# Altium PCB Arduino UNO R3-V2.PcbDoc
Units mm, origin at the board's own origin, x right, y up, seen from the top; angles counter-clockwise.
Board outline 68 x 58 mm, 4 copper layers (L1, L2, L3, L4), stack 0.603 mm thick; 49 components, 60 nets, 266 pads, 62 vias.
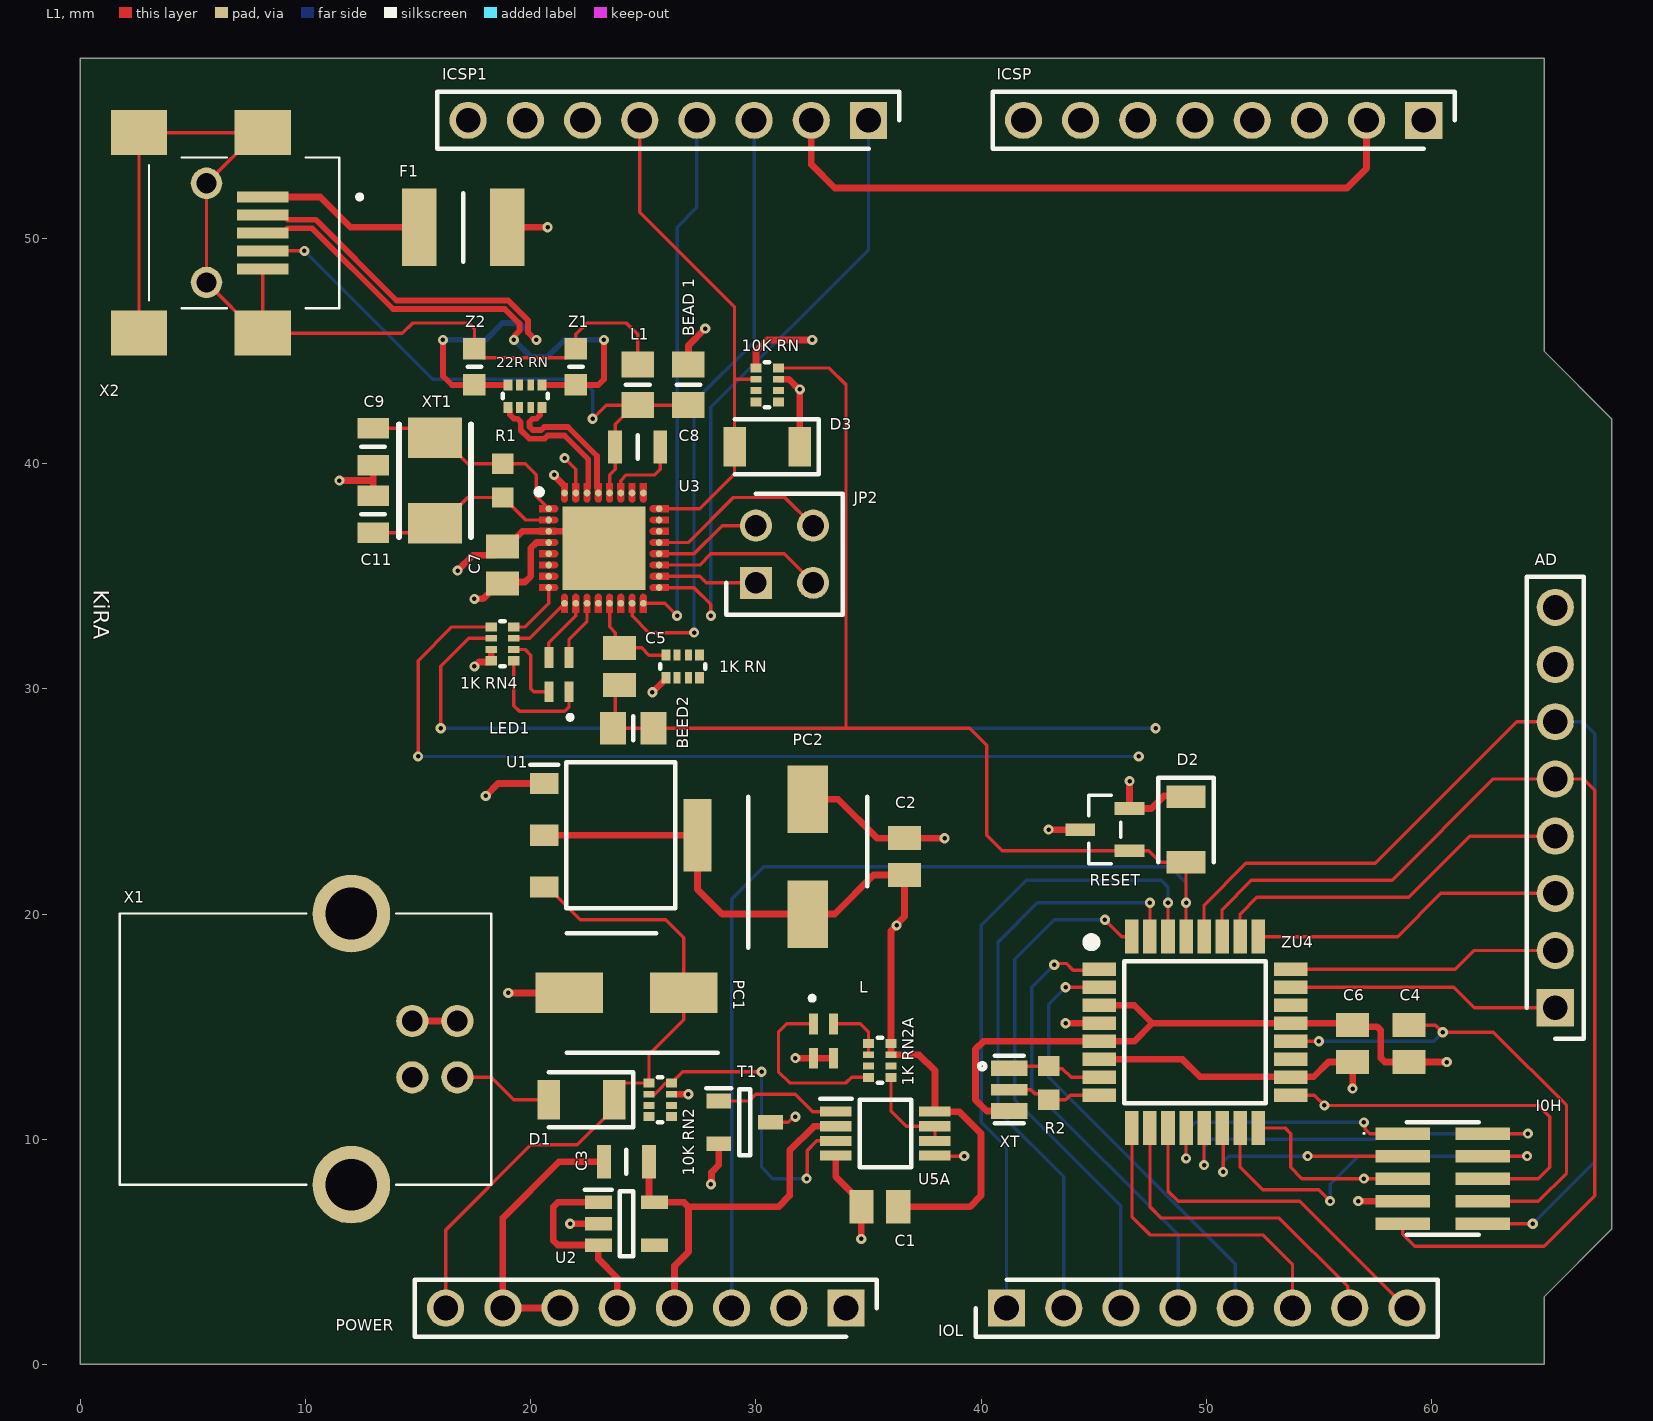
[diagram p0: L1 view]
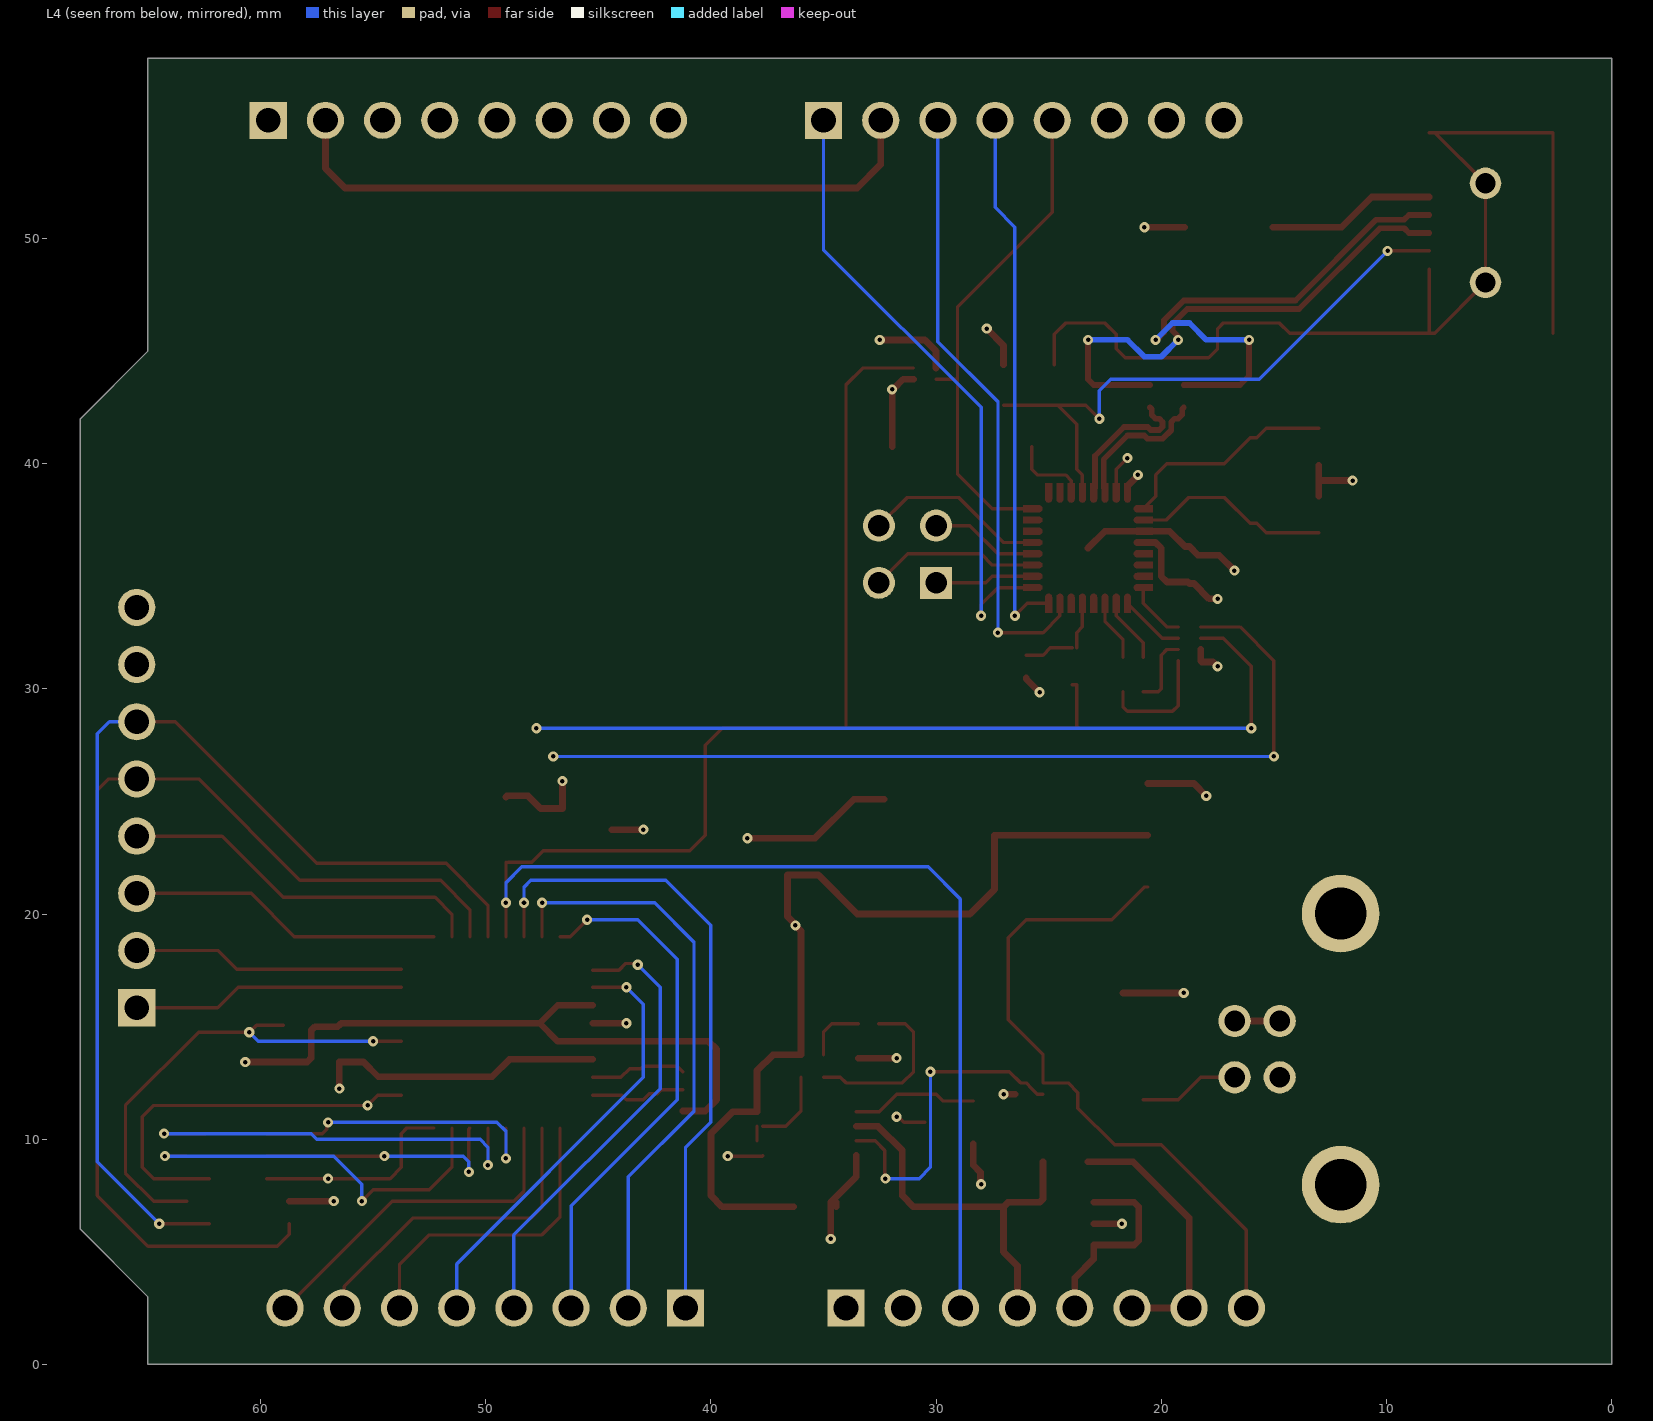
[diagram p1: L4 view, seen from below]
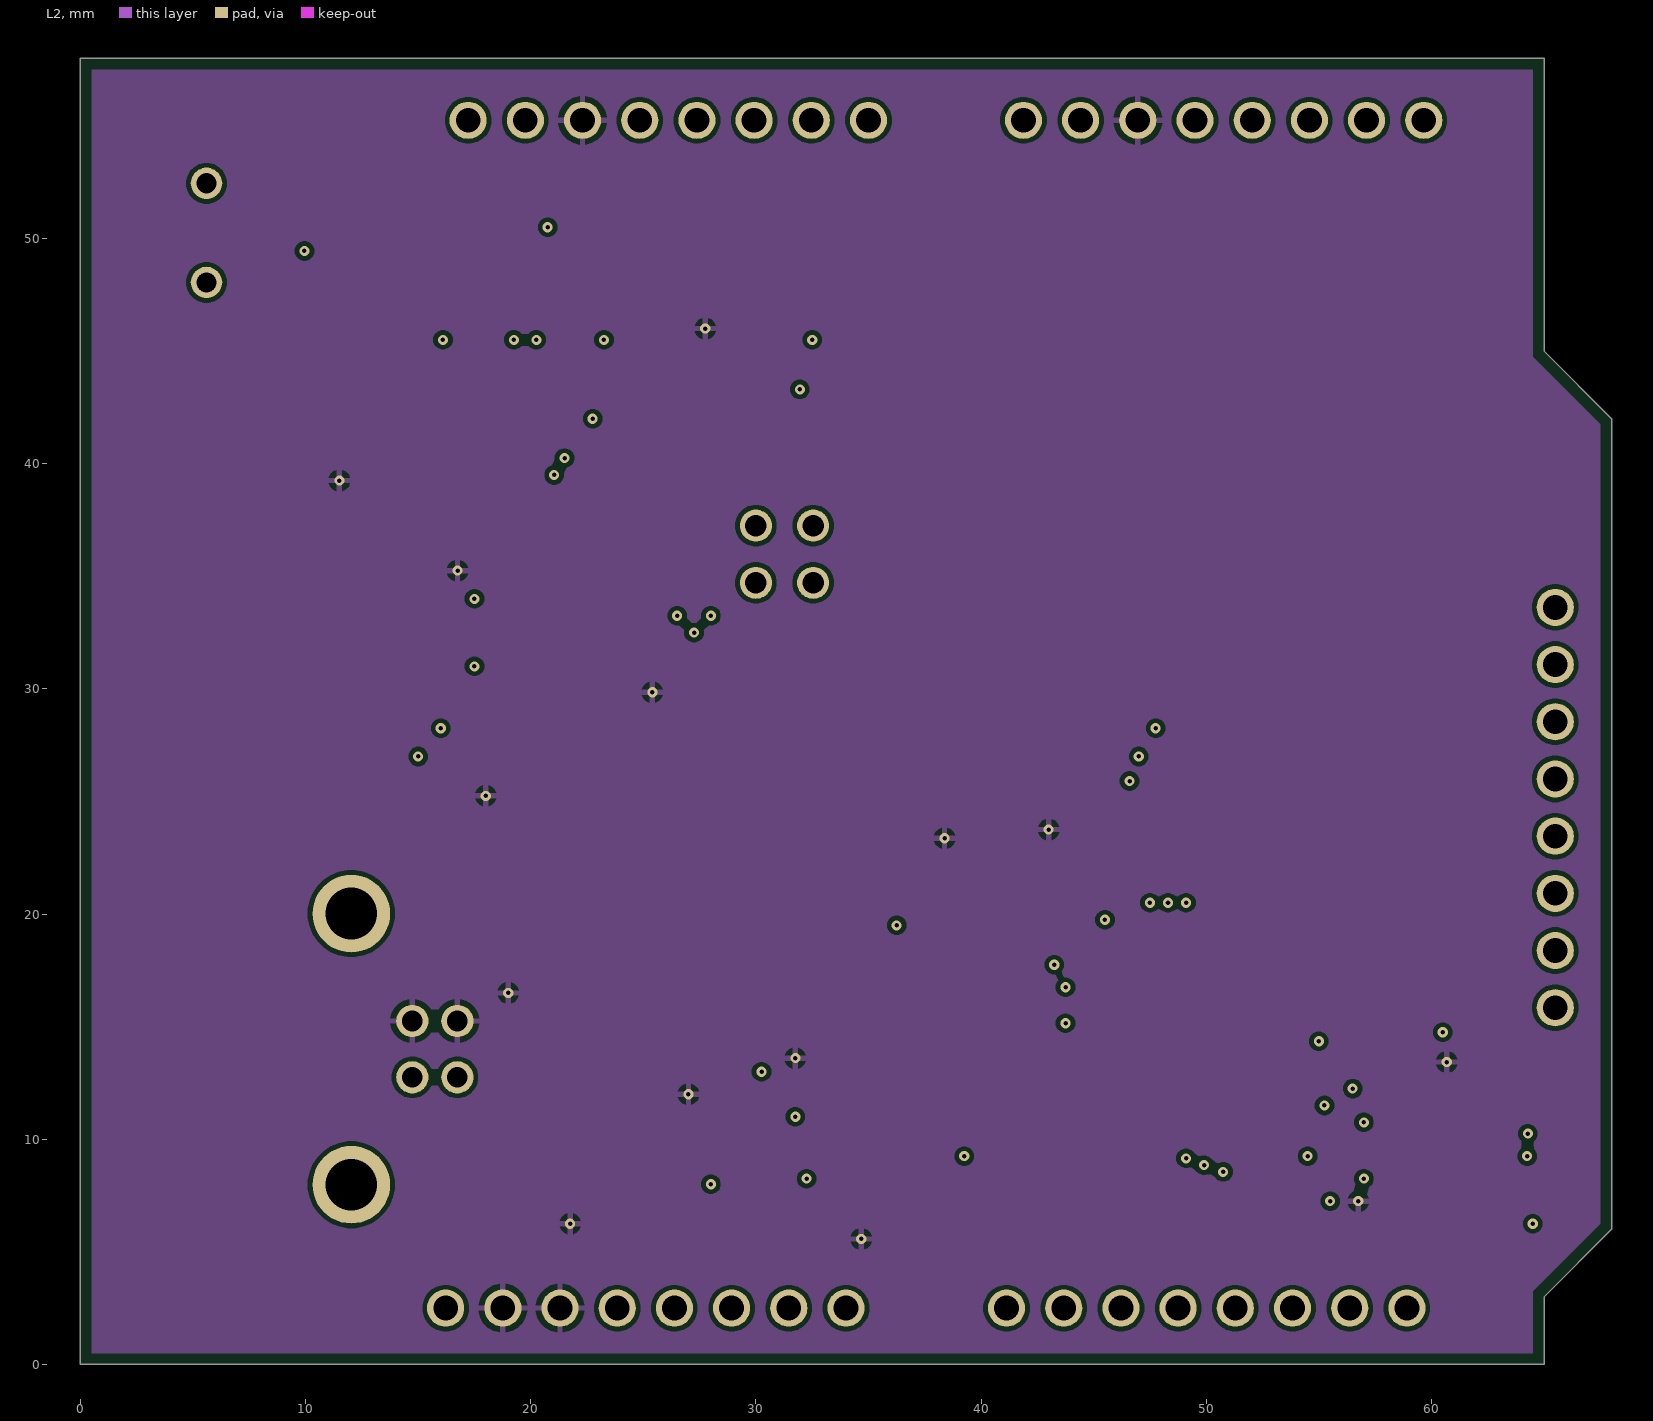
[diagram p2: L2]
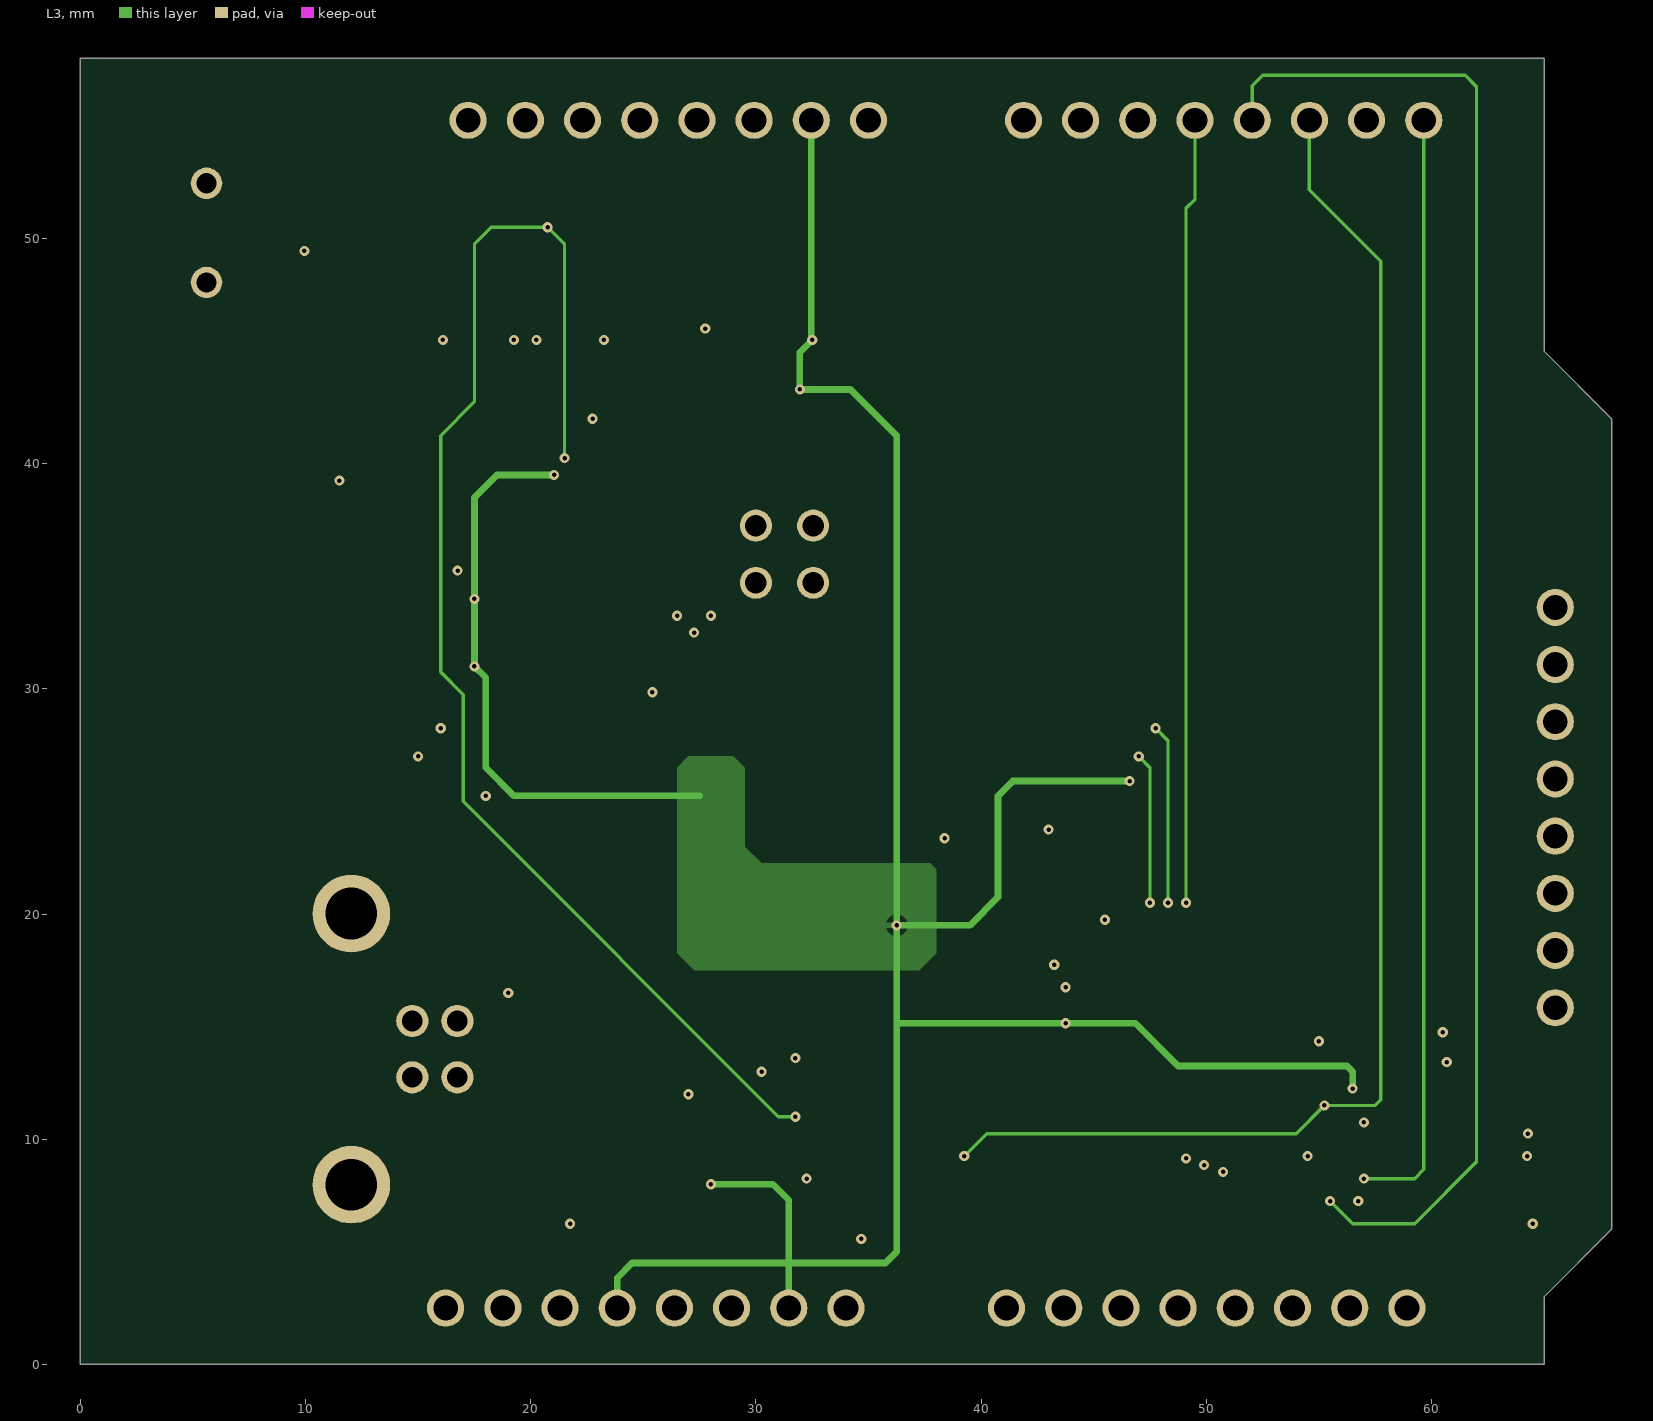
[diagram p3: L3]
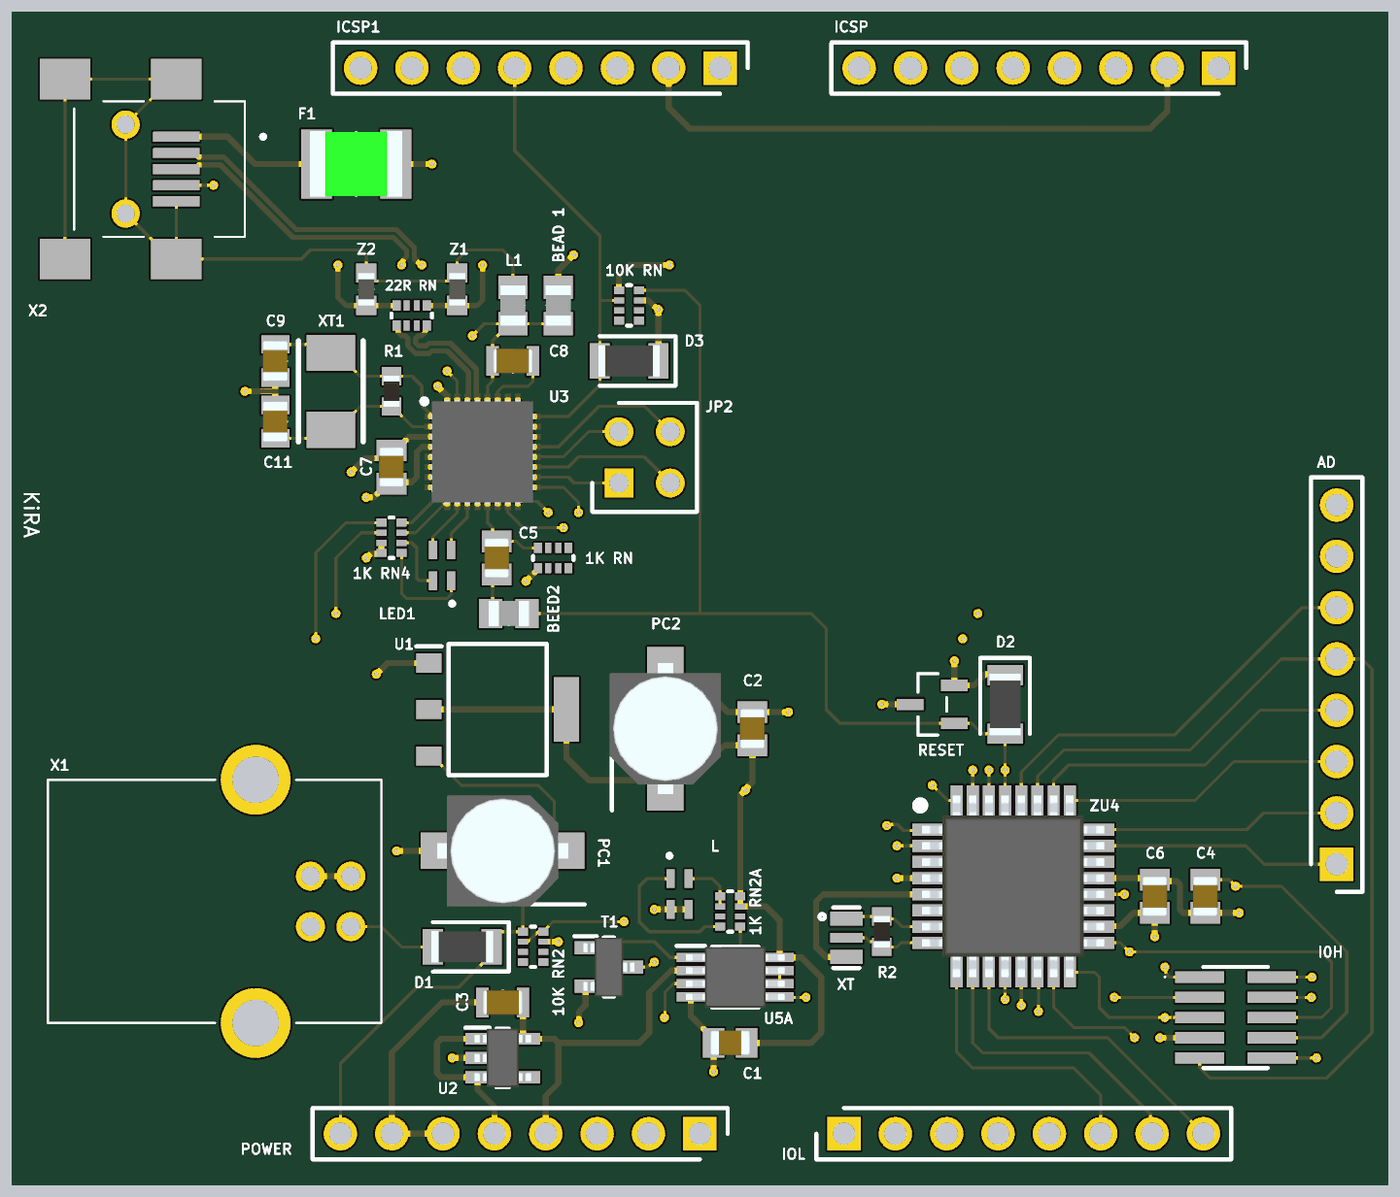
[diagram p4: 3D render of the assembled board from above, using the file's embedded part models]

## Layer stack, top to bottom
Top Solder: solder mask 0.0102, Solder Resist, Dk 3.5
L1: signal copper 0.0356
Dielectric 2: prepreg 0.0711, PP-006, Dk 4.1
L2: signal copper 0.035
Dielectric 1: dielectric 0.32, FR-4, Dk 4.8
L3: signal copper 0.035
Dielectric 3: prepreg 0.0711, PP-006, Dk 4.1
L4: signal copper 0.0356
Bottom Solder: solder mask 0.0102, Solder Resist, Dk 3.5

## Board outline
0,58 0,0 65,0 65,3 68,6 68,42 65,45 65,58

## Design rules (kind name [scope] priority, off if disabled: settings)
Clearance [All] p1: gap=0.1 ignorepadtopadclearanceinfootprint=FALSE except(0: Arc-Arc Arc-Track Arc-Hole Track-Track Track-Hole SMDPad-Hole THPad-Hole Via-Hole Fill-Text Fill-Hole Poly-Text Poly-Hole Region-Text Region-Hole Text-Text Text-Hole; 0.12: Arc-SMDPad Arc-Fill Arc-Poly Arc-Region Track-SMDPad Track-Fill Track-Poly Track-Region SMDPad-SMDPad SMDPad-Via THPad-Via; 0.14: Arc-THPad Track-THPad; 0.2: THPad-Fill THPad-Poly THPad-Region Via-Fill Via-Poly Via-Region)
DiffPairsRouting [All] p1: maxlimit=0.254 minlimit=0.127 mostfreqgap=0.127 toplayer_minwidth=0.254 toplayer_maxwidth=0.254 toplayer_prefwidth=0.254 midlayer1_minwidth=0.254 midlayer1_maxwidth=0.254 midlayer1_prefwidth=0.254 midlayer2_minwidth=0.254 midlayer2_maxwidth=0.254 midlayer2_prefwidth=0.254 bottomlayer_minwidth=0.254 bottomlayer_maxwidth=0.254 bottomlayer_prefwidth=0.254 maxuncoupledlength=12.7
MinimumSolderMaskSliver [All] p1: minsoldermaskwidth=0.05
PolygonConnect [All] p1: connectstyle=Relief reliefconductorwidth=0.254 reliefentries=4 polygonreliefangle="90 Angle" airgapwidth=0.254
RoutingVias [All] p1: holewidth=0.45 width=1.27 viastyle="Through Hole" minholewidth=0.2 minwidth=0.45 maxholewidth=0.45 maxwidth=1.27
SilkToSolderMaskClearance [IsPad] p1: minsilkscreentomaskgap=0.05 clearancetoexposedcopper=TRUE
SolderMaskExpansion [All] p1: expansion=0.102 istentingtop=FALSE
SupplyNets "Schematic Supply Nets_1" [InNet('GND')] p1: voltage=0.000
SupplyNets "Schematic Supply Nets" [InNet('+5')] p2: voltage=0.000
Width "Schematic Width Constraint_2" [InNet('+5')] p1: maxlimit=0.3 minlimit=0.3 preferedwidth=0.3
Width "Schematic Width Constraint_1" [InNet('+3V3')] p2: maxlimit=0.3 minlimit=0.3 preferedwidth=0.3
Width "Schematic Width Constraint" [InNet('GND')] p3: maxlimit=0.3 minlimit=0.3 preferedwidth=0.3
Width [All] p4: maxlimit=0.5 minlimit=0.15 preferedwidth=0.15
27 further rules are at their usual default settings.

## Classes and differential pairs
component class "Connectors & Regulators": "1K RN2A" "10K RN2" C1 C2 C3 D1 L PC1 PC2 POWER T1 U1 U2 U5A X1
component class ATMega328P-PU: "1K RN4" AD BEED2 C4 C5 C6 D2 I0H ICSP IOL LED1 R2 RESET XT ZU4
component class ATMEGA16U2-MU: "1K RN" "10K RN" "22R RN" "BEAD 1" C7 C8 C9 C11 D3 F1 ICSP1 JP2 L1 R1 U3 X2 XT1 Z1 Z2

## Components (designator, comment, footprint, x,y, rotation, side; value= is the part's Value field where it differs from the comment)
"1K RN" "1K" CAY10-XXXJ4 26.75,31 r180 top
"1K RN2A" "1K" CAY10-XXXJ4 35.5,13.5 r90 top
"1K RN4" "1K" CAY10-XXXJ4 18.75,32 r90 top
"10K RN" "10K" CAY10-XXXJ4 30.5,43.5 r90 top
"10K RN2" "10K" CAY10-XXXJ4 25.75,11.75 r270 top
"22R RN" "22R" CAY10-XXXJ4 19.75,43 r0 top
AD "6X1F-8.5" HDRV8W90P0X254_1X8_2032X249X560P 65.5,15.84 r90 top
"BEAD 1" "GROUND" BEADC2012X105N 27,43.5 r270 top
BEED2 "RESET_EN" BEADC2012X105N 24.55,28.25 r180 top
C1 "100nF" CAPC2012X130N 35.5,7 r180 top
C2 "100nF" CAPC2012X130N 36.6,22.55 r90 top
C3 "1uF" CAPC2012X145N 24.25,9 r180 top
C4 "100nF" CAPC2012X130N 59,14.25 r270 top
C5 "100nF" CAPC2012X130N 23.95,31 r270 top
C6 "100nF" CAPC2012X130N 56.5,14.25 r270 top
C7 "100nF" CAPC2012X130N 18.75,35.5 r270 top
C8 "1uF" CAPC2012X145N 24.75,40.75 r0 top
C9 "22pF" CAPC2012X70N 13,40.75 r90 top
C11 "22pF" CAPC2012X70N 13,37.75 r270 top
D1 "CD1206-S01575" DIOC3016X65N 22.25,11.75 r180 top
D2 "CD1206-S01575" DIOC3016X65N 49.1,23.75 r270 top
D3 "CD1206-S01575" DIOC3016X65N 30.5,40.75 r180 top
F1 "MF-MSMF050" FUSC4632X75N 17,50.5 r0 top
I0H "10X1F-H8.5" FTMH10503LDV 60.5,8.25 r270 top
ICSP "3X2 M" HDRV8W90P0X254_1X8_2032X249X560P 59.66,55.25 r180 top
ICSP1 "8X1 M" HDRV8W90P0X254_1X8_2032X249X560P 35,55.25 r180 top
IOL "8X1F-H8.5" HDRV8W90P0X254_1X8_2032X249X560P 41.13,2.5 r0 top
JP2 "2X2 M" HDRV4W77P254_2X2_467X488X821P 30,34.71 r0 top
L "Red" SML522MD8WT86 33,14.75 r90 top
L1 "BLM21BD601SH1D" BEADC2012X105N 24.75,43.5 r90 top
LED1 "RXTX LED" SML522MD8WT86 21.25,30.25 r270 top
PC1 "47uF" CAPAE530X610N 24.25,16.5 r180 top
PC2 "47uF" CAPAE530X610N 32.3,22.55 r90 top
POWER "8X1F-H8.5" HDRV8W90P0X254_1X8_2032X249X560P 34,2.5 r180 top
R1 "1M" RESC1608X55N 18.75,39.25 r90 top
R2 "1M" RESC1608X55N 43,12.5 r90 top
RESET "TS42031" SOT95P240X110-3N 45.5,23.75 r180 top
T1 "FDN340P" SOT95P251X112-3N 29.5,10.75 r0 top
U1 "NCP1117ST50T3G" SOT230P700X180-4N 24,23.5 r0 top
U2 "LP2985" SOT95P280X145-5N 24.25,6.25 r0 top
U3 "ATMEGA16U2-MU" QFN50P500X500X100-33N-D 23.25,36.25 r0 top
U5A "LMV358IDGKR" SOP65P490X110-8N 35.75,10.25 r0 top
X1 "DC21MMX" USBBSRA 10,14 r270 top
X2 "USB_B_TH" 17340351 7.55,50.25 r0 top
XT "CSTCE16M0V53-R0" CSTCE-V 41.25,12.2 r90 top
XT1 "16MHz" MODEL-445 15.75,39.25 r90 top
Z1 "CG0603MLC-05E" VARC1608X55N 22,44.3 r270 top
Z2 "CG0603MLC-05E" VARC1608X55N 17.5,44.3 r270 top
ZU4 "ATMEGA328P-AU" QFP80P900X900X120-32N 49.5,14.75 r0 top

## Footprints (in the part's own frame and the unit in brackets; to place one, negate y for a bottom-side part, rotate by r counter-clockwise, add the part's x,y. Pads: shape width x height; smd on the part's side, far side on the other; paste and mask are expansions set on the pad)
17340351 [mm]
  rect 2.3x0.5 smd: 1(0.55,1.6) 2(0.55,0.8) 3(0.55,0) 4(0.55,-0.8) 5(0.55,-1.6)
  rect 2.5x2 smd: 6(0.55,4.45) 7(0.55,-4.45) 8(-4.95,4.45) 9(-4.95,-4.45)
  round 1.4 hole 0.9: 10(-1.95,2.2) 11(-1.95,-2.2)
  silkscreen extent -4.5,-3.35 4.95,3.35
BEADC2012X105N [mm]
  rect 1.15x1.45 smd: 1(-0.9,0) 2(0.9,0)
  silkscreen extent 0,-0.53 0,0.53, body extent -1,-0.63 1,0.63, height 1.05
CAPAE530X610N [mm]
  rect 3x1.8 smd: 1(-2.55,0) 2(2.55,0)
  silkscreen extent -4.05,-2.65 2.65,2.65, body extent -3.25,-2.75 3.25,2.75, height 6.1
CAPC2012X70N [mm]
  rect 0.91x1.39 smd: 1(-0.82,0) 2(0.82,0)
  silkscreen extent 0,-0.53 0,0.53, body extent -1,-0.63 1,0.63, height 0.7
CAPC2012X130N [mm]
  rect 1.07x1.47 smd: 1(-0.82,0) 2(0.82,0)
  body extent -1,-0.63 1,0.63, height 1.3
CAPC2012X145N [mm]
  rect 0.62x1.47 smd: 1(-1,0) 2(1,0)
  silkscreen extent 0,-0.53 0,0.53, body extent -1,-0.63 1,0.63, height 1.45
CAY10-XXXJ4 [mm]
  rect 0.4x0.5 smd: 1(-0.75,-0.5) 4(0.75,-0.5) 5(0.75,0.5) 8(-0.75,0.5)
  rect 0.3x0.5 smd: 2(-0.25,-0.5) 3(0.25,-0.5) 6(0.25,0.5) 7(-0.25,0.5)
  silkscreen extent -1,-0.1 1,0.1
CSTCE-V [mm]
  rect 0.7x1.6 smd: 1(0.95,0) 3(-0.95,0)
  rect 0.5x1.6 smd: 2(0,0)
  silkscreen extent -1.5,-0.65 1.5,1.34
DIOC3016X65N [mm]
  rect 1x1.75 smd: 1(-1.45,0) 2(1.45,0)
  silkscreen extent -2.3,-1.22 1.45,1.22, body extent -1.53,-0.77 1.53,0.77, height 0.65
FTMH10503LDV [mm]
  rect 0.56x2.41 smd: 1(-2,-1.78) 2(-2,1.78) 3(-1,-1.78) 4(-1,1.78) 5(0,-1.78) 6(0,1.78) 7(1,-1.78) 8(1,1.78) 9(2,-1.78) 10(2,1.78)
  silkscreen extent -2.5,-3.53 2.5,1.59
FUSC4632X75N [mm]
  rect 1.53x3.43 smd: 1(-1.96,0) 2(1.96,0)
  silkscreen extent 0,-1.52 0,1.52, body extent -2.27,-1.62 2.27,1.62, height 0.75
HDRV4W77P254_2X2_467X488X821P [mm]
  rect 1.425x1.425 / inner round 1.425 / far side rect 1.425x1.425 hole 0.95: 1(0,0)
  round 1.425 hole 0.95: 2(0,2.54) 3(2.54,0) 4(2.54,2.54)
  silkscreen extent -1.32,-1.43 3.86,3.97
HDRV8W90P0X254_1X8_2032X249X560P [mm]
  rect 1.65x1.65 / inner round 1.65 / far side rect 1.65x1.65 hole 1.1: 1(0,0)
  round 1.65 hole 1.1: 2(2.54,0) 3(5.08,0) 4(7.62,0) 5(10.16,0) 6(12.7,0) 7(15.24,0) 8(17.78,0)
  silkscreen extent -1.37,-1.27 19.15,1.27
MODEL-445 [mm]
  rect 1.8x2.4 smd: 1(-1.9,0) 2(1.9,0)
  silkscreen extent -2.5,-1.6 2.5,1.6
QFN50P500X500X100-33N-D [mm]
  round 0.3 smd: 1(-2.45,1.75) 2(-2.45,1.25) 3(-2.45,0.75) 4(-2.45,0.25) 5(-2.45,-0.25) 6(-2.45,-0.75) 7(-2.45,-1.25) 8(-2.45,-1.75) 9(-1.75,-2.45) 10(-1.25,-2.45) 11(-0.75,-2.45) 12(-0.25,-2.45) 13(0.25,-2.45) 14(0.75,-2.45) 15(1.25,-2.45) 16(1.75,-2.45) 17(2.45,-1.75) 18(2.45,-1.25) 19(2.45,-0.75) 20(2.45,-0.25) 21(2.45,0.25) 22(2.45,0.75) 23(2.45,1.25) 24(2.45,1.75) 25(1.75,2.45) 26(1.25,2.45) 27(0.75,2.45) 28(0.25,2.45) 29(-0.25,2.45) 30(-0.75,2.45) 31(-1.25,2.45) 32(-1.75,2.45)
  rrect0% 3.7x3.7 smd: 33(0,0)
  L1 region: -2.875,-0.1 -2.175,-0.099 -2.136,-0.104 -2.099,-0.119 -2.068,-0.143 -2.044,-0.174 -2.029,-0.211 -2.024,-0.25 -2.029,-0.289 -2.044,-0.326 -2.068,-0.357 -2.099,-0.381 -2.136,-0.396 -2.175,-0.401 -2.175,-0.4 -2.875,-0.4
  L1 region: -2.875,-0.6 -2.175,-0.599 -2.136,-0.604 -2.099,-0.619 -2.068,-0.643 -2.044,-0.674 -2.029,-0.711 -2.024,-0.75 -2.029,-0.789 -2.044,-0.826 -2.068,-0.857 -2.099,-0.881 -2.136,-0.896 -2.175,-0.901 -2.175,-0.9 -2.875,-0.9
  L1 region: -2.875,-1.1 -2.175,-1.099 -2.136,-1.104 -2.099,-1.119 -2.068,-1.143 -2.044,-1.174 -2.029,-1.211 -2.024,-1.25 -2.029,-1.289 -2.044,-1.326 -2.068,-1.357 -2.099,-1.381 -2.136,-1.396 -2.175,-1.401 -2.175,-1.4 -2.875,-1.4
  L1 region: -0.4,-2.875 -0.401,-2.175 -0.396,-2.136 -0.381,-2.099 -0.357,-2.068 -0.326,-2.044 -0.289,-2.029 -0.25,-2.024 -0.211,-2.029 -0.174,-2.044 -0.143,-2.068 -0.119,-2.099 -0.104,-2.136 -0.099,-2.175 -0.1,-2.175 -0.1,-2.875
  L1 region: 0.6,-2.875 0.599,-2.175 0.604,-2.136 0.619,-2.099 0.643,-2.068 0.674,-2.044 0.711,-2.029 0.75,-2.024 0.789,-2.029 0.826,-2.044 0.857,-2.068 0.881,-2.099 0.896,-2.136 0.901,-2.175 0.9,-2.175 0.9,-2.875
  L1 region: 2.875,0.6 2.175,0.599 2.136,0.604 2.099,0.619 2.068,0.643 2.044,0.674 2.029,0.711 2.024,0.75 2.029,0.789 2.044,0.826 2.068,0.857 2.099,0.881 2.136,0.896 2.175,0.901 2.175,0.9 2.875,0.9
  L1 region: 2.875,1.1 2.175,1.099 2.136,1.104 2.099,1.119 2.068,1.143 2.044,1.174 2.029,1.211 2.024,1.25 2.029,1.289 2.044,1.326 2.068,1.357 2.099,1.381 2.136,1.396 2.175,1.401 2.175,1.4 2.875,1.4
  L1 region: 1.9,2.875 1.901,2.175 1.896,2.136 1.881,2.099 1.857,2.068 1.826,2.044 1.789,2.029 1.75,2.024 1.711,2.029 1.674,2.044 1.643,2.068 1.619,2.099 1.604,2.136 1.599,2.175 1.6,2.175 1.6,2.875
  L1 region: 1.4,2.875 1.401,2.175 1.396,2.136 1.381,2.099 1.357,2.068 1.326,2.044 1.289,2.029 1.25,2.024 1.211,2.029 1.174,2.044 1.143,2.068 1.119,2.099 1.104,2.136 1.099,2.175 1.1,2.175 1.1,2.875
  L1 region: -1.6,2.875 -1.599,2.175 -1.604,2.136 -1.619,2.099 -1.643,2.068 -1.674,2.044 -1.711,2.029 -1.75,2.024 -1.789,2.029 -1.826,2.044 -1.857,2.068 -1.881,2.099 -1.896,2.136 -1.901,2.175 -1.9,2.175 -1.9,2.875
  L1 region: -2.875,0.4 -2.175,0.401 -2.136,0.396 -2.099,0.381 -2.068,0.357 -2.044,0.326 -2.029,0.289 -2.024,0.25 -2.029,0.211 -2.044,0.174 -2.068,0.143 -2.099,0.119 -2.136,0.104 -2.175,0.099 -2.175,0.1 -2.875,0.1
  L1 region: 0.1,-2.875 0.099,-2.175 0.104,-2.136 0.119,-2.099 0.143,-2.068 0.174,-2.044 0.211,-2.029 0.25,-2.024 0.289,-2.029 0.326,-2.044 0.357,-2.068 0.381,-2.099 0.396,-2.136 0.401,-2.175 0.4,-2.175 0.4,-2.875
  L1 region: -2.875,0.9 -2.175,0.901 -2.136,0.896 -2.099,0.881 -2.068,0.857 -2.044,0.826 -2.029,0.789 -2.024,0.75 -2.029,0.711 -2.044,0.674 -2.068,0.643 -2.099,0.619 -2.136,0.604 -2.175,0.599 -2.175,0.6 -2.875,0.6
  L1 region: -1.9,-2.875 -1.901,-2.175 -1.896,-2.136 -1.881,-2.099 -1.857,-2.068 -1.826,-2.044 -1.789,-2.029 -1.75,-2.024 -1.711,-2.029 -1.674,-2.044 -1.643,-2.068 -1.619,-2.099 -1.604,-2.136 -1.599,-2.175 -1.6,-2.175 -1.6,-2.875
  L1 region: -2.875,-1.6 -2.175,-1.599 -2.136,-1.604 -2.099,-1.619 -2.068,-1.643 -2.044,-1.674 -2.029,-1.711 -2.024,-1.75 -2.029,-1.789 -2.044,-1.826 -2.068,-1.857 -2.099,-1.881 -2.136,-1.896 -2.175,-1.901 -2.175,-1.9 -2.875,-1.9
  L1 region: 2.875,-1.9 2.175,-1.901 2.136,-1.896 2.099,-1.881 2.068,-1.857 2.044,-1.826 2.029,-1.789 2.024,-1.75 2.029,-1.711 2.044,-1.674 2.068,-1.643 2.099,-1.619 2.136,-1.604 2.175,-1.599 2.175,-1.6 2.875,-1.6
  L1 region: 1.6,-2.875 1.599,-2.175 1.604,-2.136 1.619,-2.099 1.643,-2.068 1.674,-2.044 1.711,-2.029 1.75,-2.024 1.789,-2.029 1.826,-2.044 1.857,-2.068 1.881,-2.099 1.896,-2.136 1.901,-2.175 1.9,-2.175 1.9,-2.875
  L1 region: -2.875,1.9 -2.175,1.901 -2.136,1.896 -2.099,1.881 -2.068,1.857 -2.044,1.826 -2.029,1.789 -2.024,1.75 -2.029,1.711 -2.044,1.674 -2.068,1.643 -2.099,1.619 -2.136,1.604 -2.175,1.599 -2.175,1.6 -2.875,1.6
  L1 region: -2.875,1.4 -2.175,1.401 -2.136,1.396 -2.099,1.381 -2.068,1.357 -2.044,1.326 -2.029,1.289 -2.024,1.25 -2.029,1.211 -2.044,1.174 -2.068,1.143 -2.099,1.119 -2.136,1.104 -2.175,1.099 -2.175,1.1 -2.875,1.1
  L1 region: 2.875,-1.4 2.175,-1.401 2.136,-1.396 2.099,-1.381 2.068,-1.357 2.044,-1.326 2.029,-1.289 2.024,-1.25 2.029,-1.211 2.044,-1.174 2.068,-1.143 2.099,-1.119 2.136,-1.104 2.175,-1.099 2.175,-1.1 2.875,-1.1
  L1 region: 2.875,-0.9 2.175,-0.901 2.136,-0.896 2.099,-0.881 2.068,-0.857 2.044,-0.826 2.029,-0.789 2.024,-0.75 2.029,-0.711 2.044,-0.674 2.068,-0.643 2.099,-0.619 2.136,-0.604 2.175,-0.599 2.175,-0.6 2.875,-0.6
  L1 region: 2.875,-0.4 2.175,-0.401 2.136,-0.396 2.099,-0.381 2.068,-0.357 2.044,-0.326 2.029,-0.289 2.024,-0.25 2.029,-0.211 2.044,-0.174 2.068,-0.143 2.099,-0.119 2.136,-0.104 2.175,-0.099 2.175,-0.1 2.875,-0.1
  L1 region: 2.875,0.1 2.175,0.099 2.136,0.104 2.099,0.119 2.068,0.143 2.044,0.174 2.029,0.211 2.024,0.25 2.029,0.289 2.044,0.326 2.068,0.357 2.099,0.381 2.136,0.396 2.175,0.401 2.175,0.4 2.875,0.4
  L1 region: -0.1,2.875 -0.099,2.175 -0.104,2.136 -0.119,2.099 -0.143,2.068 -0.174,2.044 -0.211,2.029 -0.25,2.024 -0.289,2.029 -0.326,2.044 -0.357,2.068 -0.381,2.099 -0.396,2.136 -0.401,2.175 -0.4,2.175 -0.4,2.875
  L1 region: -0.6,2.875 -0.599,2.175 -0.604,2.136 -0.619,2.099 -0.643,2.068 -0.674,2.044 -0.711,2.029 -0.75,2.024 -0.789,2.029 -0.826,2.044 -0.857,2.068 -0.881,2.099 -0.896,2.136 -0.901,2.175 -0.9,2.175 -0.9,2.875
  L1 region: 2.875,1.6 2.175,1.599 2.136,1.604 2.099,1.619 2.068,1.643 2.044,1.674 2.029,1.711 2.024,1.75 2.029,1.789 2.044,1.826 2.068,1.857 2.099,1.881 2.136,1.896 2.175,1.901 2.175,1.9 2.875,1.9
  L1 region: -1.4,-2.875 -1.401,-2.175 -1.396,-2.136 -1.381,-2.099 -1.357,-2.068 -1.326,-2.044 -1.289,-2.029 -1.25,-2.024 -1.211,-2.029 -1.174,-2.044 -1.143,-2.068 -1.119,-2.099 -1.104,-2.136 -1.099,-2.175 -1.1,-2.175 -1.1,-2.875
  L1 region: 1.1,-2.875 1.099,-2.175 1.104,-2.136 1.119,-2.099 1.143,-2.068 1.174,-2.044 1.211,-2.029 1.25,-2.024 1.289,-2.029 1.326,-2.044 1.357,-2.068 1.381,-2.099 1.396,-2.136 1.401,-2.175 1.4,-2.175 1.4,-2.875
  L1 region: 0.9,2.875 0.901,2.175 0.896,2.136 0.881,2.099 0.857,2.068 0.826,2.044 0.789,2.029 0.75,2.024 0.711,2.029 0.674,2.044 0.643,2.068 0.619,2.099 0.604,2.136 0.599,2.175 0.6,2.175 0.6,2.875
  L1 region: -0.9,-2.875 -0.901,-2.175 -0.896,-2.136 -0.881,-2.099 -0.857,-2.068 -0.826,-2.044 -0.789,-2.029 -0.75,-2.024 -0.711,-2.029 -0.674,-2.044 -0.643,-2.068 -0.619,-2.099 -0.604,-2.136 -0.599,-2.175 -0.6,-2.175 -0.6,-2.875
  L1 region: 0.4,2.875 0.401,2.175 0.396,2.136 0.381,2.099 0.357,2.068 0.326,2.044 0.289,2.029 0.25,2.024 0.211,2.029 0.174,2.044 0.143,2.068 0.119,2.099 0.104,2.136 0.099,2.175 0.1,2.175 0.1,2.875
  L1 region: -1.1,2.875 -1.099,2.175 -1.104,2.136 -1.119,2.099 -1.143,2.068 -1.174,2.044 -1.211,2.029 -1.25,2.024 -1.289,2.029 -1.326,2.044 -1.357,2.068 -1.381,2.099 -1.396,2.136 -1.401,2.175 -1.4,2.175 -1.4,2.875
  silkscreen extent -3,2.38 -2.75,2.62, body extent -2.55,-2.55 2.55,2.55, height 1
QFP80P900X900X120-32N [mm]
  rect 1.5x0.6 smd: 1(-4.25,2.8) 2(-4.25,2) 3(-4.25,1.2) 4(-4.25,0.4) 5(-4.25,-0.4) 6(-4.25,-1.2) 7(-4.25,-2) 8(-4.25,-2.8) 17(4.25,-2.8) 18(4.25,-2) 19(4.25,-1.2) 20(4.25,-0.4) 21(4.25,0.4) 22(4.25,1.2) 23(4.25,2) 24(4.25,2.8)
  rect 0.6x1.5 smd: 9(-2.8,-4.25) 10(-2,-4.25) 11(-1.2,-4.25) 12(-0.4,-4.25) 13(0.4,-4.25) 14(1.2,-4.25) 15(2,-4.25) 16(2.8,-4.25) 25(2.8,4.25) 26(2,4.25) 27(1.2,4.25) 28(0.4,4.25) 29(-0.4,4.25) 30(-1.2,4.25) 31(-2,4.25) 32(-2.8,4.25)
  silkscreen extent -4.8,-3.15 3.15,4.2, body extent -4.5,-4.5 4.5,4.5, height 1.2
RESC1608X55N [mm]
  rect 0.9x0.95 smd: 1(-0.75,0) 2(0.75,0)
  body extent -0.77,-0.4 0.77,0.4, height 0.55
SML522MD8WT86 [mm]
  rect 0.925x0.4 smd: 1(0.375,0.45) 2(-1.15,0.45) 3(0.375,-0.45) 4(-1.15,-0.45)
  silkscreen extent 1.41,0.4 1.61,0.6
SOP65P490X110-8N [mm]
  rect 1.4x0.45 smd: 1(-2.2,0.975) 2(-2.2,0.325) 3(-2.2,-0.325) 4(-2.2,-0.975) 5(2.2,-0.975) 6(2.2,-0.325) 7(2.2,0.325) 8(2.2,0.975)
  silkscreen extent -2.9,-1.5 1.15,1.55, body extent -2.45,-1.5 2.45,1.5, height 1.1
SOT95P240X110-3N [mil]
  rect 52x22 smd: 1(-43,37) 2(-43,-37) 3(43,0)
  silkscreen extent -28,-60 28,60
SOT95P251X112-3N [mm]
  rect 1.1x0.65 smd: 1(-1.15,0.95) 2(-1.15,-0.95) 3(1.15,0)
  silkscreen extent -1.7,-1.46 0.25,1.53, body extent -1.25,-1.46 1.25,1.46, height 1.12
SOT95P280X145-5N [mm]
  rect 1.2x0.6 smd: 1(-1.25,0.95) 2(-1.25,0) 3(-1.25,-0.95) 4(1.25,-0.95) 5(1.25,0.95)
  silkscreen extent -1.85,-1.45 0.3,1.5, body extent -1.4,-1.45 1.4,1.45, height 1.45
SOT230P700X180-4N [mm]
  rect 1.25x0.95 smd: 1(-3.4,2.3) 2(-3.4,0) 3(-3.4,-2.3)
  rect 1.25x3.2 smd: 4(3.4,0)
  silkscreen extent -4.03,-3.25 2.42,3.25
USBBSRA [mm]
  round 1.431 hole 0.92: 1(-1.25,6.74) 2(1.25,6.74) 3(-1.25,4.74) 4(1.25,4.74)
  round 3.45 hole 2.3: 5(-6.02,2.03) 6(6.02,2.03)
  silkscreen extent -6.02,-8.25 6.02,8.25
VARC1608X55N [mm]
  rect 0.95x1 smd: 1(-0.8,0) 2(0.8,0)
  silkscreen extent 0,-0.3 0,0.3, body extent -0.8,-0.4 0.8,0.4, height 0.55

## Part data
"1K RN" "1K RN2A" "1K RN4" "10K RN" "10K RN2" "22R RN": library part CAY10-220J4LF, "CAY10 convex chip resistor array,22R Bourns CAY10 Series 22 5% Isolated SMT Resistor Array, 4 Resistors, 0.125W total 0804 package Convex", Manufacturer_Name=Bourns, Mouser Part Number=652-CAY10-220J4LF, RS Part Number=1674746, Allied Price/Stock=https://www.alliedelec.com/bourns-cay10-220j4lf/70276318/, Allied_Number=70276318, Datasheet Link=http://docs-emea.rs-online.com/webdocs/064e/0900766b8064e463.pdf, Manufacturer_Part_Number=CAY10-220J4LF, Mouser Price/Stock=https://www.mouser.com/Search/Refine.aspx?Keyword=652-CAY10-220J4LF, RS Price/Stock=http://uk.rs-online.com/web/p/products/1674746
AD ICSP ICSP1 IOL POWER: library part 90120-0768, "8 way single row straight header Molex C-GRID III Series, Series Number 90120, 2.54mm Pitch 8 Way 1 Row Straight Pin Header, Through Hole", Manufacturer_Name=Molex, Mouser Part Number=538-90120-0768, RS Part Number=1671900, Allied Price/Stock=https://www.alliedelec.com/molex-incorporated-90120-0768/70372836/, Allied_Number=70372836, Datasheet Link=http://www.molex.com/molex/products/datasheet.jsp?part=active/0901200768_PCB_HEADERS.xml, Geometry.Height=5.6mm, Manufacturer_Part_Number=90120-0768, Mouser Price/Stock=https://www.mouser.com/Search/Refine.aspx?Keyword=538-90120-0768, RS Price/Stock=http://uk.rs-online.com/web/p/products/1671900
"BEAD 1" BEED2: library part BLM21BD601SH1D, "Chip Ferrite Bead 600R 0805 300mA 1LN", Manufacturer_Name="Murata Electronics", Mouser Part Number=81-BLM21BD601SH1D, RS Part Number=1048541P, Datasheet Link=https://componentsearchengine.com/Datasheets/2/BLM21BD601SH1D.pdf, Geometry.Height=1.05mm, Manufacturer_Part_Number=BLM21BD601SH1D, Mouser Price/Stock=https://www.mouser.com/Search/Refine.aspx?Keyword=81-BLM21BD601SH1D, RS Price/Stock=http://uk.rs-online.com/web/p/products/1048541P
C1 C2 C4 C5 C6 C7: library part 0805Y0500104KXT, "Syfer Technology 0805 Flexicap 100nF Ceramic Multilayer Capacitor, 50 V, +125C, X7R Dielectric, 10% SMD", Manufacturer_Name=Syfer, Mouser Part Number=7738389P, Datasheet Link=http://docs-emea.rs-online.com/webdocs/119d/0900766b8119d7bc.pdf, Geometry.Height=1.3mm, Manufacturer_Part_Number=0805Y0500104KXT, Mouser Price/Stock=http://uk.rs-online.com/web/p/products/7738389P, RS Part Number=7738389P, RS Price/Stock=http://uk.rs-online.com/web/p/products/7738389P
C3 C8: library part C2012C0G2A103J125AA, "Multilayer Ceramic Capacitors MLCC - SMD/SMT 0805 C0G 100volts 0.01uF 5% 1.25mm", Manufacturer_Name=TDK, Mouser Part Number=810-C2012C0G2A103JAA, Datasheet Link=https://product.tdk.com/info/en/catalog/datasheets/mlcc_commercial_midvoltage_en.pdf, Geometry.Height=1.45mm, Manufacturer_Part_Number=C2012C0G2A103J125AA, Mouser Price/Stock=https://www.mouser.com/Search/Refine.aspx?Keyword=810-C2012C0G2A103JAA
C9 C11: library part GRM2165C1H220JZ01D, "MURATA - GRM2165C1H220JZ01D - CAP, MLCC, C0G/NP0, 22PF, 50V, 0805", Manufacturer_Name="Murata Electronics", Mouser Part Number=81-GRM2165C1H220JZ, RS Part Number=7236243, Datasheet Link=http://www.murata.com/~/media/webrenewal/support/library/catalog/products/capacitor/mlcc/c02e.pdf, Geometry.Height=0.7mm, Manufacturer_Part_Number=GRM2165C1H220JZ01D, Mouser Price/Stock=https://www.mouser.com/Search/Refine.aspx?Keyword=81-GRM2165C1H220JZ, RS Price/Stock=http://uk.rs-online.com/web/p/products/7236243
D1 D2 D3: "Diode Switching 100V 0.15A 4ns SMD1206 Bourns CD1206-S01575 Switching Diode, 150mA, 100V, 4ns, 2-Pin 1206", Manufacturer_Name=Bourns, Mouser Part Number=652-CD1206-S01575, RS Part Number=1775431, Allied Price/Stock=http://www.alliedelec.com/bourns-cd1206-s01575/70154675/, Allied_Number=70154675, Datasheet Link=http://docs-emea.rs-online.com/webdocs/1189/0900766b811897a9.pdf, Geometry.Height=0.65mm, Manufacturer_Part_Number=CD1206-S01575, Mouser Price/Stock=https://www.mouser.com/Search/Refine.aspx?Keyword=652-CD1206-S01575, RS Price/Stock=http://uk.rs-online.com/web/p/products/1775431
F1: library part 1812L050_30PR, "Littelfuse 0.5A Resettable Surface Mount Fuse, 30V dc", Manufacturer_Name=LITTELFUSE, Manufacturer_Part_Number=1812L050/30PR, Mouser Part Number=576-1812L050/30PR, RS Part Number=8951631P, Datasheet Link=https://www.arrow.com/en/products/1812l05030pr/littelfuse, Geometry.Height=0.75mm, Mouser Price/Stock=https://www.mouser.com/Search/Refine.aspx?Keyword=576-1812L050%2F30PR, RS Price/Stock=http://uk.rs-online.com/web/p/products/8951631P
I0H: library part FTMH-105-03-L-DV, "Header 1mm PCB SMT vertical 10way Samtec FTMH Series, 1mm Pitch 10 Way 2 Row Straight Pin Header, Surface Mount, Solder Termination", Manufacturer_Name=SAMTEC, Mouser Part Number=200-FTMH10503LDV, RS Part Number=7668984P, Datasheet Link=http://suddendocs.samtec.com/prints/ftmh-1xx-xx-xx-dv-xx-mkt.pdf, Manufacturer_Part_Number=FTMH-105-03-L-DV, Mouser Price/Stock=https://www.mouser.com/Search/Refine.aspx?Keyword=200-FTMH10503LDV, RS Price/Stock=http://uk.rs-online.com/web/p/products/7668984P
JP2: library part 5-146256-2, "AMP - TE CONNECTIVITY - 5-146256-2 - CONNECTOR, HEADER, 4 POSITION, 2ROWS, 2.54MM", Manufacturer_Name="TE Connectivity", Mouser Part Number=571-5-146256-2, RS Part Number=7972955, Allied Price/Stock=https://www.alliedelec.com/te-connectivity-5-146256-2/70085239/, Allied_Number=70085239, Datasheet Link=http://www.mouser.com/ds/2/418/NG_CD_146256_H-649289.pdf, Geometry.Height=8.21mm, Manufacturer_Part_Number=5-146256-2, Mouser Price/Stock=https://www.mouser.com/Search/Refine.aspx?Keyword=571-5-146256-2, RS Price/Stock=http://uk.rs-online.com/web/p/products/7972955
L LED1: library part SML-522MU8WT86, "Dual color mini-mold Chip LED: ROHM's chip LED lineup consists of standard type,top-view type, side-view type and reverse-mount type.", Manufacturer_Name="ROHM Semiconductor", Mouser Part Number=755-SML-522MU8WT86, RS Part Number=1682468, Datasheet Link=https://www.rohm.com/datasheet/SML-522MU8W/sml-52-e, Geometry.Height=0mm, Manufacturer_Part_Number=SML-522MU8WT86, Mouser Price/Stock=https://www.mouser.com/Search/Refine.aspx?Keyword=755-SML-522MU8WT86, RS Price/Stock=http://uk.rs-online.com/web/p/products/1682468
L1: "Chip Ferrite Bead 600R 0805 300mA 1LN", Manufacturer_Name="Murata Electronics", Mouser Part Number=81-BLM21BD601SH1D, RS Part Number=1048541P, Datasheet Link=https://componentsearchengine.com/Datasheets/2/BLM21BD601SH1D.pdf, Geometry.Height=1.05mm, Manufacturer_Part_Number=BLM21BD601SH1D, Mouser Price/Stock=https://www.mouser.com/Search/Refine.aspx?Keyword=81-BLM21BD601SH1D, RS Price/Stock=http://uk.rs-online.com/web/p/products/1048541P
PC1 PC2: library part EEE-FT1V470AR, "Aluminum Electrolytic Capacitors - SMD 47uF 35volts 5x5.8mm SMD", Manufacturer_Name=Panasonic, Mouser Part Number=667-EEE-FT1V470AR, Allied Price/Stock=https://www.alliedelec.com/panasonic-eee-ft1v470ar/70258388/, Allied_Number=70258388, Datasheet Link=https://industrial.panasonic.com/cdbs/www-data/pdf/RDE0000/ABA0000C1240.pdf, Geometry.Height=6.1mm, Manufacturer_Part_Number=EEE-FT1V470AR, Mouser Price/Stock=https://www.mouser.com/Search/Refine.aspx?Keyword=667-EEE-FT1V470AR
R1 R2: library part CPF0603B1M0E1, "TE CONNECTIVITY - CPF0603B1M0E1 - RES, THIN FILM, 1M, 0.1%, 0.063W, 0603", Manufacturer_Name="TE Connectivity", Mouser Part Number=279-CPF0603B1M0E1, Datasheet Link=http://www.farnell.com/datasheets/1786775.pdf, Geometry.Height=0.55mm, Manufacturer_Part_Number=CPF0603B1M0E1, Mouser Price/Stock=https://www.mouser.com/Search/Refine.aspx?Keyword=279-CPF0603B1M0E1
RESET: library part DS1818R-5+, "3.3V EconoReset with Pushbutton", Manufacturer_Name="Maxim Integrated", Manufacturer_Part_Number=DS1818R-5+
T1: "FDN340P, P-channel MOSFET Transistor 2 A 20 V, 3-Pin SuperSOT", Manufacturer_Name="Fairchild Semiconductor", Mouser Part Number=512-FDN340P, RS Part Number=6710435P, Datasheet Link=http://docs-emea.rs-online.com/webdocs/0d23/0900766b80d23111.pdf, Geometry.Height=1.12mm, Manufacturer_Part_Number=FDN340P, Mouser Price/Stock=https://www.mouser.com/Search/Refine.aspx?Keyword=512-FDN340P, RS Price/Stock=http://uk.rs-online.com/web/p/products/6710435P
U1: "ON SEMICONDUCTOR - NCP1117ST50T3G - LDO, REG, 20VIN, 1A, 5V, 1%, SOT223-3", Manufacturer_Name="ON Semiconductor", Mouser Part Number=863-NCP1117ST50T3G, RS Part Number=8022130P, Allied Price/Stock=http://www.alliedelec.com/on-semiconductor-ncp1117st50t3g/70466898/, Allied_Number=70466898, Datasheet Link=http://www.onsemi.com/pub/Collateral/NCP1117-D.PDF, Geometry.Height=1.8mm, Manufacturer_Part_Number=NCP1117ST50T3G, Mouser Price/Stock=https://www.mouser.com/Search/Refine.aspx?Keyword=863-NCP1117ST50T3G, RS Price/Stock=http://uk.rs-online.com/web/p/products/8022130P
U2: library part LP2985-33DBVR, "150-mA Low-noise Low-dropout Regulator With Shutdown", Manufacturer_Name="Texas Instruments", Mouser Part Number=595-LP2985-33DBVR, Datasheet Link=http://www.ti.com/lit/gpn/lp2985, Geometry.Height=1.45mm, Manufacturer_Part_Number=LP2985-33DBVR, Mouser Price/Stock=https://www.mouser.com/Search/Refine.aspx?Keyword=595-LP2985-33DBVR
U3: "8-bit Microcontrollers - MCU AVR USB 8K FLASH AVR USB 16K FLASH", Manufacturer_Name=Microchip, Mouser Part Number=556-ATMEGA16U2-MU, RS Part Number=1717746, Datasheet Link=http://ww1.microchip.com/downloads/en/DeviceDoc/doc7799.pdf, Geometry.Height=1mm, Manufacturer_Part_Number=ATMEGA16U2-MU, Mouser Price/Stock=https://www.mouser.com/Search/Refine.aspx?Keyword=556-ATMEGA16U2-MU, RS Price/Stock=http://uk.rs-online.com/web/p/products/1717746
U5A: "OP Amp Dual GP R-R O/P 5.5V 8-Pin MSOP Texas Instruments LMV358IDGKR, Dual Op Amp, 1MHz CMOS, Rail to Rail, 3 V, 5 V, 8-Pin MSOP", Manufacturer_Name="Texas Instruments", Mouser Part Number=595-LMV358IDGKR, RS Part Number=1625114, Datasheet Link=http://www.ti.com/lit/ds/symlink/lmv358.pdf, Geometry.Height=1.1mm, Manufacturer_Part_Number=LMV358IDGKR, Mouser Price/Stock=https://www.mouser.com/Search/Refine.aspx?Keyword=595-LMV358IDGKR, RS Price/Stock=http://uk.rs-online.com/web/p/products/1625114
X1: library part USB-B-S-RA, "MULTICOMP - USB-B-S-RA - USB, 2.0 TYPE B, RECEPTACLE, TH", Manufacturer_Name=MULTICOMP, Datasheet Link=http://www.farnell.com/datasheets/1788391.pdf, Geometry.Height=10mm, Manufacturer_Part_Number=USB-B-S-RA
X2: library part 1734035-1, "AMP - TE CONNECTIVITY - 1734035-1. - MINI USB, 2.0 TYPE B, RECEPTACLE, SMT", Manufacturer_Name="TE Connectivity", Mouser Part Number=571-1734035-1, Allied Price/Stock=https://www.alliedelec.com/te-connectivity-1734035-1/70086812/, Allied_Number=70086812, Datasheet Link=http://www.te.com/commerce/DocumentDelivery/DDEController?Action=srchrtrv&DocNm=1734035&DocType=Customer+Drawing&DocLang=English, Geometry.Height=4mm, Manufacturer_Part_Number=1734035-1, Mouser Price/Stock=https://www.mouser.com/Search/Refine.aspx?Keyword=571-1734035-1
XT: "Ceramic resonator SMT CSTCE 16.00MHz CSTCE16M0V53-R0, Ceramic Resonator, 16MHz Expander 15pF, 3-Pin Cap Chip, 3.2 x 1.3 x 0.9mm", Manufacturer_Name="Murata Electronics", Mouser Part Number=81-CSTCE16M0V53-R0, RS Part Number=7926524P, Datasheet Link=http://uk.rs-online.com/web/p/products/6241077, Manufacturer_Part_Number=CSTCE16M0V53-R0, Mouser Price/Stock=https://www.mouser.com/Search/Refine.aspx?Keyword=81-CSTCE16M0V53-R0, RS Price/Stock=http://uk.rs-online.com/web/p/products/7926524P
XT1: library part 445I35D16M00000, "Crystals 16MHz +/-30ppm 18pF -40C +85C", Manufacturer_Name=CTS, Mouser Part Number=774-445I35D16M00000, Datasheet Link=http://www.mouser.com/ds/2/96/008-0360-0-786290.pdf, Manufacturer_Part_Number=445I35D16M00000, Mouser Price/Stock=https://www.mouser.com/Search/Refine.aspx?Keyword=774-445I35D16M00000
Z1 Z2: "Varistor, ESD Protector, 5VDC,20V,0603 Bourns MLC Series Power Varistor 0.5pF 20V 0603 Case", Manufacturer_Name=Bourns, Mouser Part Number=652-CG0603MLC-05E, RS Part Number=8518256, Allied Price/Stock=https://www.alliedelec.com/bourns-cg0603mlc-05e/70153503/, Allied_Number=70153503, Datasheet Link=http://www.farnell.com/datasheets/1785244.pdf, Geometry.Height=0.55mm, Manufacturer_Part_Number=CG0603MLC-05E, Mouser Price/Stock=https://www.mouser.com/Search/Refine.aspx?Keyword=652-CG0603MLC-05E, RS Price/Stock=http://uk.rs-online.com/web/p/products/8518256
ZU4: "MICROCHIP - ATMEGA328P-AU. - MICROCONTROLLER MCU, 8 BIT, ATMEGA, 20MHZ, TQFP-32", Manufacturer_Name=Microchip, Mouser Part Number=556-ATMEGA328P-AU, RS Part Number=1310271, Datasheet Link=https://componentsearchengine.com/Datasheets/2/ATMEGA328P-AU.pdf, Geometry.Height=1.2mm, Manufacturer_Part_Number=ATMEGA328P-AU, Mouser Price/Stock=https://www.mouser.com/Search/Refine.aspx?Keyword=556-ATMEGA328P-AU, RS Price/Stock=http://uk.rs-online.com/web/p/products/1310271

## Via types
v1: diameter 0.45, hole 0.2, L1 to L4, 62 vias

## Nets (pads, with @x,y where several pads share a name; then routed paths per layer and width w, separated by ;. In a path a pad name is that pad's centre, name@x,y a point inside that pad or via, vN(x,y) a via of type N, cw(c..) or ccw(c..) an arc to the next point about the centre after c; other vN are vias at no path point)
+3V3: C3.1 POWER.4 U2.5 U5A.2 | length 17.5
  L1 w0.3: C3.1 25.25,7.35 25.4,7.2 U2.5 26.8,7.2 27,7 ; POWER.4 26.38,4.38 27,5 27,7 ; U5A.2 32.575,10.575 31.5,9.5 31.5,7.5 31,7 27,7
+5: "1K RN2A.3" "1K RN2A.4" "1K RN4.7" "1K RN4.8" "10K RN.3" "10K RN.5" C1.1 C2.1 C6.2 C7.2 D2.1 D3.1 ICSP1.2 ICSP.2 PC2.1 POWER.2 POWER.5 RESET.2 T1.2 U1.2 U1.4 U2.1 U2.3 U3.4 U3.32 U5A.8 ZU4.4 ZU4.6 ZU4.18 | length 254.4
  L1 w0.3: v1(17.5,31) 17.7,31.2 18.2,31.2 18.25,31.25 18.25,31.75 ; v1(17.5,34) 17.87,34 18.55,34.68 C7.2 18.82,34.75 19.75,34.75 20,35 20,36.25 20.25,36.5 U3.4 ; U1.2 U1.4 27.4,21.1 28.5,20 PC2.1 33.5,20 35.23,21.73 C2.1 36.6,19.891 36.25,19.541 v1(36.25,19.5) 36,19.25 36,14.25 36,13.75 37.25,13.75 37.95,13.05 U5A.8 39.025,11.225 40,10.25 40,7.5 39.5,7 C1.1 ; v1(21.037,39.5) 21.037,39.472 21.5,39.009 U3.32 ; U2.1 21.2,7.2 21,7 21,5.5 21.2,5.3 U2.3 23,4.68 23.84,3.84 POWER.5 ; v1(28,8) 28.029,8.029 28.029,8.529 28.35,8.851 T1.2 ; 30,44.25 30,45 30.5,45.5 v1(32.5,45.5) ; 31,43.75 31.459,43.75 31.909,43.3 v1(31.95,43.3) D3.1 ; ICSP1.2 32.46,53.29 33.5,52.25 56.25,52.25 57.12,53.12 ICSP.2 ; v1(43.75,15.15) ZU4.4 ; ZU4.6 48.95,13.55 49.726,12.774 54.774,12.774 55.43,13.43 C6.2 v1(56.5,12.25) ; v1(46.592,25.908) RESET.2 47.56,24.69 48.12,25.25 49.05,25.25 D2.1
  L3 w0.3: v1(21.037,39.5) 18.5,39.5 17.5,38.5 v1(17.5,34) v1(17.5,31) 18,30.5 18,26.5 19.25,25.25 27.5,25.25 ; POWER.5 23.84,3.84 24.5,4.5 31.46,4.5 ; v1(28,8) 30.75,8 31.46,7.29 31.46,4.5 ; POWER.2 31.46,4.5 ; ICSP1.2 32.46,45.46 31.95,44.95 v1(31.95,43.3) 34.2,43.3 36.25,41.25 v1(36.25,19.5) ; v1(46.592,25.908) 41.408,25.908 40.75,25.25 40.75,20.75 39.5,19.5 v1(36.25,19.5) ; v1(56.5,12.25) 56.5,13 56.25,13.25 48.75,13.25 46.85,15.15 v1(43.75,15.15) 36.35,15.15 36.25,15.25 ; 31.46,4.5 35.75,4.5 36.25,5 36.25,15.25 ; 36.25,15.25 v1(36.25,19.5)
AD0: AD.1 ZU4.23 | length 12.1
  L1 w0.15: ZU4.23 61,16.75 61.91,15.84 AD.1
AD1: AD.2 ZU4.24 | length 12.1
  L1 w0.15: ZU4.24 61.05,17.55 61.88,18.38 AD.2
AD2: AD.3 ZU4.25 | length 14
  L1 w0.15: ZU4.25 58.5,19 60.42,20.92 AD.3
AD3: AD.4 ZU4.26 | length 16.4
  L1 w0.15: ZU4.26 51.5,20 52.25,20.75 59,20.75 61.71,23.46 AD.4
AD4/SDA: AD.5 I0H.9 ZU4.27 | length 48.5
  L1 w0.15: ZU4.27 50.7,20.2 52,21.5 58.25,21.5 62.75,26 AD.5 66.75,26 67.25,25.5 67.25,7.5 65,5.25 59.25,5.25 58.72,5.78 I0H.9
AD5/SCL: AD.6 I0H.10 ZU4.28 | length 47.5
  L1 w0.15: ZU4.28 49.9,20.4 51.75,22.25 57.5,22.25 63.79,28.54 AD.6 ; I0H.10 v1(64.5,6.25)
  L4 w0.15: v1(64.5,6.25) 67.25,9 67.25,28 66.71,28.54 AD.6
AREF: C4.1 I0H.8 ZU4.20 | length 21.4
  L1 w0.15: ZU4.20 v1(55,14.35) ; C4.1 60.18,15.07 v1(60.5,14.75) ; 60.75,14.75 62.75,14.75 66,11.5 66,8.5 64.75,7.25 I0H.8@63.28,7.25
  L4 w0.15: v1(55,14.35) 60.1,14.35 v1(60.5,14.75)
CMP: "10K RN2.2" "10K RN2.8" U5A.3 | length 14.6
  L1 w0.15: 25.25,12 25.5,12 25.75,12.25 26,12.5 26.25,12.5 26.75,13 v1(30.25,13) ; v1(32.249,8.251) 32.28,8.282 32.28,9.5 32.705,9.925 U5A.3
  L4 w0.15: v1(30.25,13) 30.25,8.75 30.75,8.25 v1@32.248,8.25
D+: "22R RN.5" X2.3 Z1.2 | length 23.3
  L1 w0.254: X2.3 9,50.25 9.21,50.46 10.291,50.46 13.881,46.869 18.842,46.869 19.497,46.214 19.497,45.904 19.288,45.695 19.288,45.538 v1(19.25,45.5) ; 20.5,43.5 Z1.2 23,43.5 23.25,43.75 v1(23.25,45.5)
  L4 w0.254: v1(19.25,45.5) 20,44.75 20.75,44.75 21.5,45.5 v1(23.25,45.5)
D-: "22R RN.8" X2.2 Z2.2 | length 24.2
  L1 w0.254: X2.2 9,51.05 9.209,50.841 10.448,50.841 14.039,47.25 19,47.25 19.878,46.372 19.878,45.824 20.201,45.5 v1(20.25,45.5) ; v1(16.1,45.5) 16.1,43.9 16.5,43.5 Z2.2 19,43.5
  L4 w0.254: v1(16.1,45.5) 18,45.5 18.75,46.25 19.5,46.25 v1(20.25,45.5)
DTR: "1K RN.4" C5.1 U3.13 | length 4.3
  L1 w0.15: U3.13 23.5,32.75 23.75,32.5 C5.1@23.75,31.82 ; C5.1 24.93,31.82 25.25,31.5 26,31.5
GATECMD: T1.1 U5A.1 | length 5.6
  L1 w0.15: T1.1 29.7,11.7 30,12 31.75,12 32.525,11.225 U5A.1
GND: "1K RN.5" "10K RN2.7" "BEAD 1.1" C1.2 C2.2 C3.2 C4.2 C6.1 C7.1 C9.1 C11.1 I0H.7 ICSP1.6 ICSP.6 L.2 L.4 PC1.2 PC2.2 POWER.6 POWER.7 RESET.3 U1.1 U2.2 U3.3 U3.33 U5A.4 X1.1 X1.3 XT.3 ZU4.3 ZU4.5 ZU4.21 | length 80.3
  L1 w0.3: v1(11.5,39.25) 13,39.25 ; C11.1 13,39.25 ; C9.1 13,39.25 ; X1.3 X1.1 ; v1(16.75,35.25) 17.435,35.935 18.365,35.935 C7.1 18.95,36.32 19.63,37 U3.3 22.5,37 U3.33 ; v1(18,25.25) 18.55,25.8 U1.1 ; v1(19,16.5) PC1.2 ; POWER.6 POWER.7 18.76,6.51 21.25,9 C3.2 ; v1(21.75,6.25) U2.2 ; v1(25.4,29.85) 26,30.45 26,30.5 ; 26.5,12 v1(27,12) ; 27,44.4 27,45.25 v1(27.75,46) ; v1(31.75,13.6) L.2 L.4 ; PC2.2 33.65,25.1 35.38,23.37 C2.2 v1(38.38,23.37) ; U5A.4 33.55,8.33 34.68,7.2 C1.2 v1(34.68,5.57) ; C1.2@34.43,7 C1.2@34.43,7.2 ; XT.3 40.25,11.25 39.75,11.75 39.75,14 40.1,14.35 ZU4.5 46.8,14.35 47.6,15.15 ; v1(43,23.75) RESET.3 ; ZU4.3 46.8,15.95 47.6,15.15 ; v1(56.75,7.25) I0H.7 ; v1(60.68,13.43) C4.2 57.926,13.43 57.75,13.606 57.75,14.824 57.574,15 56.57,15 C6.1 56.42,15.15 ZU4.21 47.6,15.15
GREENLED: "1K RN2A.5" "1K RN2A.6" L.3 | length 2.7
  L1 w0.15: L.3 34.625,15.125 35,14.75 35,14.25 35,13.75
IO0: "1K RN4.6" IOL.1 ZU4.30 | length 74.2
  L1 w0.15: v1(16,28.25) 16,31.008 17.242,32.25 18.25,32.25 ; ZU4.30 v1(48.3,20.5)
  L3 w0.15: v1(47.75,28.25) 48.3,27.7 v1(48.3,20.5)
  L4 w0.15: v1(16,28.25) v1(47.75,28.25) ; IOL.1 41.13,9.62 40,10.75 40,19.5 42,21.5 48,21.5 48.3,21.2 v1(48.3,20.5)
IO1: "1K RN4.5" IOL.2 ZU4.31 | length 73.2
  L1 w0.15: v1(15,27) 15,31.25 16.5,32.75 18.25,32.75 ; ZU4.31 v1(47.5,20.5)
  L3 w0.15: v1@47.022,26.978 47.5,26.5 v1(47.5,20.5)
  L4 w0.15: v1(15,27) v1(47,27) ; IOL.2 43.67,8.33 40.75,11.25 40.75,18.75 42.5,20.5 v1(47.5,20.5)
IO2: IOL.3 ZU4.32 | length 23.7
  L1 w0.15: v1(45.5,19.75) 46.25,19 ZU4.32
  L4 w0.15: v1(45.5,19.75) 43.25,19.75 41.5,18 41.5,11.75 46.21,7.04 IOL.3
IO3: IOL.4 ZU4.1 | length 20.5
  L1 w0.15: v1(43.25,17.75) 43.306,17.806 43.775,17.806 44.081,17.5 ZU4.1@45.25,17.5
  L4 w0.15: v1(43.25,17.75) 42.25,16.75 42.25,12.25 48.75,5.75 IOL.4
IO4: IOL.5 ZU4.2 | length 19.5
  L1 w0.15: v1(43.75,16.75) ZU4.2
  L4 w0.15: v1(43.75,16.75) 43,16 43,12.75 51.29,4.46 IOL.5
IO5: IOL.6 ZU4.9 | length 13.9
  L1 w0.15: ZU4.9 46.7,6.55 47.5,5.75 52.5,5.75 53.83,4.42 IOL.6
IO6: IOL.7 ZU4.10 | length 14.7
  L1 w0.15: ZU4.10 47.5,7 48,6.5 53.25,6.5 56.288,3.462 56.288,2.582 IOL.7
IO7: IOL.8 ZU4.11 | length 15.6
  L1 w0.15: ZU4.11 48.3,7.7 48.75,7.25 54.16,7.25 IOL.8
IO8: I0H.1 ZU4.12 | length 13.8
  L1 w0.15: v1@49.1,9 v1(49.1,9.15) ZU4.12 ; v1(57,10.75) 57.057,10.693 57.057,10.443 57.25,10.25 I0H.1@59.72,10.25
  L4 w0.15: v1(49.1,9.15) 49.1,10.35 49.5,10.75 v1(57,10.75)
IO9: I0H.2 ZU4.13 | length 18.9
  L1 w0.15: v1(49.9,8.85) ZU4.13 ; I0H.2@62.455,10.25 v1(64.282,10.25)
  L4 w0.15: v1(49.9,8.85) 49.9,9.65 50.25,10 57.5,10 57.75,10.25 v1(64.282,10.25)
L13: "1K RN2A.1" U5A.6 U5A.7 | length 4.1
  L1 w0.15: 36,12.75 36,11.25 36.675,10.575 U5A.7@37.7,10.575 ; U5A.6 U5A.7
M8RXD: "1K RN4.3" U3.9 | length 2.9
  L1 w0.15: 19.25,32.25 19.95,32.25 U3.9
M8TXD: "1K RN4.4" U3.8 | length 2.7
  L1 w0.15: 19.25,32.75 19.75,32.75 20.8,33.8 U3.8
MISO: I0H.5 ICSP.1 ZU4.16 | length 58.7
  L1 w0.15: ZU4.16 53.5,10.5 53.75,10.25 53.75,8.75 54.25,8.25 I0H.5@59.72,8.25
  L3 w0.15: v1(57,8.25) 59.25,8.25 59.66,8.66 ICSP.1
MISO2: ICSP1.1 U3.17 | length 28
  L1 w0.15: U3.17 27.25,34.5 28,33.75 v1(28,33.25)
  L4 w0.15: v1(28,33.25) 28,42.5 35,49.5 ICSP1.1
MOSI: I0H.4 ICSP.4 ZU4.15 | length 85.1
  L1 w0.15: ZU4.15 51.5,8.75 52.5,7.75 55,7.75 v1(55.5,7.25) ; I0H.4@63.28,9.25 v1(64.25,9.25)
  L3 w0.15: ICSP.4 52.04,56.79 52.5,57.25 61.5,57.25 62,56.75 62,9 59.25,6.25 56.5,6.25 v1(55.5,7.25)
  L4 w0.15: v1(55.5,7.25) 55.5,8 56.75,9.25 v1(64.25,9.25)
MOSI2: ICSP1.4 U3.16 | length 24.1
  L1 w0.15: U3.16 25.95,33.8 v1(26.5,33.25)
  L4 w0.15: v1(26.5,33.25) 26.5,50.5 27.38,51.38 ICSP1.4
"Net1K RN2A_8": "1K RN2A.8" L.1 | length 7.8
  L1 w0.15: L.1 31.375,15.125 31,14.75 31,13 31.5,12.5 34,12.5 34.25,12.75 35,12.75
"Net1K RN4_1": "1K RN4.1" LED1.1 | length 5.3
  L1 w0.15: 19.25,31.25 19.25,29.25 19.5,29 21.5,29 21.7,29.2 LED1.1
"Net1K RN4_2": "1K RN4.2" LED1.3 | length 3.2
  L1 w0.15: 19.25,31.75 19.75,31.75 20,31.5 20,30 20.125,29.875 LED1.3
NetC9_2: C9.2 R1.2 U3.1 XT1.2 | length 9.8
  L1 w0.15: C9.2 15.33,41.57 XT1.2 16.05,41.15 17.2,40 R1.2 19.75,40 20.25,39.5 20.25,38.55 U3.1
NetC11_2: C11.2 R1.1 U3.2 XT1.1 | length 8.9
  L1 w0.15: C11.2 15.33,36.93 XT1.1 16.05,37.35 17.2,38.5 R1.1 18.775,38.5 19.775,37.5 U3.2
PB4: JP2.1 U3.18 | length 4.4
  L1 w0.15: U3.18 27.5,35 27.79,34.71 JP2.1
PB5: JP2.3 U3.19 | length 7.6
  L1 w0.15: U3.19 27.5,35.5 28,36 31.25,36 JP2.3
PB6: JP2.2 U3.20 | length 4.8
  L1 w0.15: U3.20 27.25,36 28.5,37.25 JP2.2
PB7: JP2.4 U3.21 | length 8.2
  L1 w0.15: U3.21 27,36.5 29,38.5 31.29,38.5 JP2.4
PWRIN: D1.2 X1.2 | length 4.5
  L1 w0.15: X1.2 18.25,12.75 19.25,11.75 D1.2
RD+: "22R RN.4" U3.29 | length 6.5
  L1 w0.254: 20.5,42.5 20.427,42.427 20.427,42.178 20.252,42.003 20.089,42.003 19.941,41.854 19.941,41.644 20.089,41.495 20.463,41.495 20.599,41.631 21.658,41.631 22.941,40.348 22.941,38.934 22.991,38.883 22.991,38.709 U3.29
RD-: "22R RN.1" U3.30 | length 6.5
  L1 w0.254: 19,42.5 19.073,42.427 19.073,42.178 19.248,42.003 19.411,42.003 19.56,41.854 19.56,41.486 19.931,41.114 20.621,41.114 20.757,41.25 21.5,41.25 22.56,40.191 22.56,38.934 22.509,38.883 22.509,38.709 U3.30
RESET: "10K RN.4" BEED2.1 BEED2.2 C5.2 D2.2 ICSP.5 POWER.3 RESET.1 ZU4.29 | length 129.2
  L1 w0.15: C5.2 23.75,30.18 23.75,28.35 BEED2.2 BEED2.1 34,28.25 ; 31,44.25 33.25,44.25 34,43.5 34,28.25 ; D2.2@49,22.3 47.95,22.3 47.44,22.81 RESET.1 40.94,22.81 40.25,23.5 40.25,27.5 39.5,28.25 34,28.25 ; ZU4.29 v1(49.1,20.5) D2.2
  L3 w0.15: v1(49.1,20.5) 49.1,51.35 49.5,51.75 ICSP.5
  L4 w0.15: POWER.3 28.92,20.67 30.35,22.1 48.4,22.1 49.1,21.4 v1(49.1,20.5)
RESET2: "10K RN.6" D3.2 ICSP1.5 U3.24 | length 22.4
  L1 w0.15: ICSP1.5 24.84,51.16 29.05,46.95 29.05,43.75 ; U3.24 27.5,38 29.05,39.55 D3.2 29.05,43.75 ; 30,43.75 29.05,43.75
RXLED: LED1.4 U3.10 | length 2.9
  L1 w0.15: LED1.4 20.8,32.05 22,33.25 U3.10
SCK: I0H.6 ICSP.3 U5A.5 ZU4.17 | length 83.2
  L1 w0.15: U5A.5@37.7,9.275 37.725,9.25 v1(39.25,9.25) ; ZU4.17 54.8,11.95 v1(55.25,11.5) 64.75,11.5 65.25,11 65.25,8.75 64.75,8.25 I0H.6
  L3 w0.15: v1(39.25,9.25) 40.25,10.25 54,10.25 v1(55.25,11.5) 57.5,11.5 57.75,11.75 57.75,49 54.58,52.17 ICSP.3
SCK2: ICSP1.3 U3.15 | length 27.5
  L1 w0.15: U3.15 24.5,33.25 25.25,32.5 v1(27.25,32.5)
  L4 w0.15: v1(27.25,32.5) 27.25,42.75 29.92,45.42 ICSP1.3
SS: I0H.3 ZU4.14 | length 11.5
  L1 w0.15: ZU4.14 50.75,10.45 v1(50.75,8.55) ; v1(54.5,9.25) I0H.3@59.72,9.25
  L4 w0.15: v1(50.75,8.55) 50.75,9 51,9.25 v1(54.5,9.25)
TP_VUCAP: C8.2 U3.27 | length 3.5
  L1 w0.15: U3.27 24,39.25 24.25,39.5 25.5,39.5 25.75,39.75 C8.2
TXLED: LED1.2 U3.11 | length 2.7
  L1 w0.15: LED1.2 21.7,32.2 22.5,33 U3.11
UGND: "BEAD 1.2" C8.1 L1.1 U3.28 X2.4 | length 27.3
  L1 w0.15: X2.4 v1(9.95,49.45) ; v1(22.75,42) 23.35,42.6 L1.1@24.6,42.6 ; U3.28 23.5,39.5 23.75,39.75 C8.1 23.75,41.75 L1.1@24.6,42.6 ; 27,42.6 L1.1 L1.1@24.6,42.6
  L4 w0.15: v1(9.95,49.45) 15.65,43.75 22.25,43.75 22.75,43.25 v1(22.75,42)
USBVCC: F1.2 T1.3 U3.31 | length 65.4
  L1 w0.15: v1(21.5,40.25) 22,39.75 U3.31 ; T1.3@30.5,10.75 T1.3 31.425,10.75 31.675,11 v1(31.75,11)
  L1 w0.3: F1.2 v1(20.75,50.5)
  L3 w0.15: v1(21.5,40.25) 21.5,49.75 v1(20.75,50.5) 18.25,50.5 17.5,49.75 17.5,42.75 16,41.25 16,30.75 17,29.75 17,25 31,11 v1(31.75,11)
USHIELD: L1.2 X2.5 X2.6 X2.7 X2.8 X2.9 X2.10 X2.11 Z1.1 Z2.1 | length 48.8
  L1 w0.15: X2.9 X2.8 X2.6@7.85,54.7 ; X2.5 X2.7 ; X2.6 X2.6@7.85,54.7 ; L1.2 24.75,45.75 24.25,46.25 22.5,46.25 22,45.75 Z1.1 21.6,44.7 17.9,44.7 Z2.1 17.5,46 17.25,46.25 14.75,46.25 14.3,45.8 X2.7 ; X2.6@7.85,54.7 X2.10 X2.11 7.85,45.8 X2.7
VIN: "10K RN2.1" D1.1 PC1.1 POWER.8 U1.3 | length 29.8
  L1 w0.15: POWER.8 16.22,5.97 20,9.75 22.075,9.75 23.7,11.375 D1.1 23.7,12.075 24.125,12.5 25.25,12.5 25.25,13.75 26.8,15.3 PC1.1 26.8,18.95 26,19.75 22.2,19.75 20.75,21.2 U1.3
XT2_1: R2.2 XT.1 ZU4.7 | length 4.3
  L1 w0.15: XT.1@41.25,13 41.5,13.25 R2.2 43.112,13.138 43.612,13.138 44,12.75 ZU4.7
XT2_2: R2.1 XT.2 ZU4.8 | length 4.3
  L1 w0.15: XT.2 42.2,12.2 42.388,12.012 42.738,12.012 R2.1 43.75,11.75 43.95,11.95 ZU4.8
XUSB: F1.1 X2.1 | length 7.5
  L1 w0.3: X2.1 10.65,51.85 12,50.5 F1.1
pads on no net: "1K RN2A.2" "1K RN2A.7" "1K RN.1" "1K RN.2" "1K RN.3" "1K RN.6" "1K RN.7" "1K RN.8" "10K RN2.3" "10K RN2.4" "10K RN2.5" "10K RN2.6" "10K RN.1" "10K RN.2" "10K RN.7" "10K RN.8" "22R RN.2" "22R RN.3" "22R RN.6" "22R RN.7" AD.7 AD.8 ICSP1.7 ICSP1.8 ICSP.7 ICSP.8 POWER.1 U2.4 U3.5 U3.6 U3.7 U3.12 U3.14 U3.22 U3.23 U3.25 U3.26 X1.4 X1.5 X1.6 ZU4.19 ZU4.22

## Polygon pours and split planes (outlines as drawn)
+5 on L3 "NONET_L-01_P-001" (solid, remove dead copper, pour order 0): 37.75,22.25 38,22 38,18.25 37.25,17.5 27.25,17.5 26.5,18.25 26.5,26.5 27,27 29,27 29.5,26.5 29.5,23 30.25,22.25 32.75,22.25
GND on L2 "NONET_L-01_P-001" (solid, remove dead copper, pour order 1): 0.5,57.5 64.5,57.5 64.5,44.75 67.5,41.75 67.5,6.25 64.5,3.25 64.5,0.5 0.5,0.5

## Silkscreen, mask and mechanical layers (free items; w line width, h text height)
Top Overlay:
  text "KiRA" at 0.6,34.4 h0.7 r270
Board outline (Mech6):
  the board outline again, w0.1